# Altium PCB PCB.PcbDoc (part 1 of 3)
Units mm, origin at the board's own origin, x right, y up, seen from the top; angles counter-clockwise.
Board outline 202.56 x 137.16 mm, 4 copper layers (Top Layer, Layer 1, Layer 2, Bottom Layer), stack 0.603 mm thick; 171 components, 95 nets, 481 pads, 76 vias.
Unrouted connection lines stored in the file: 155.
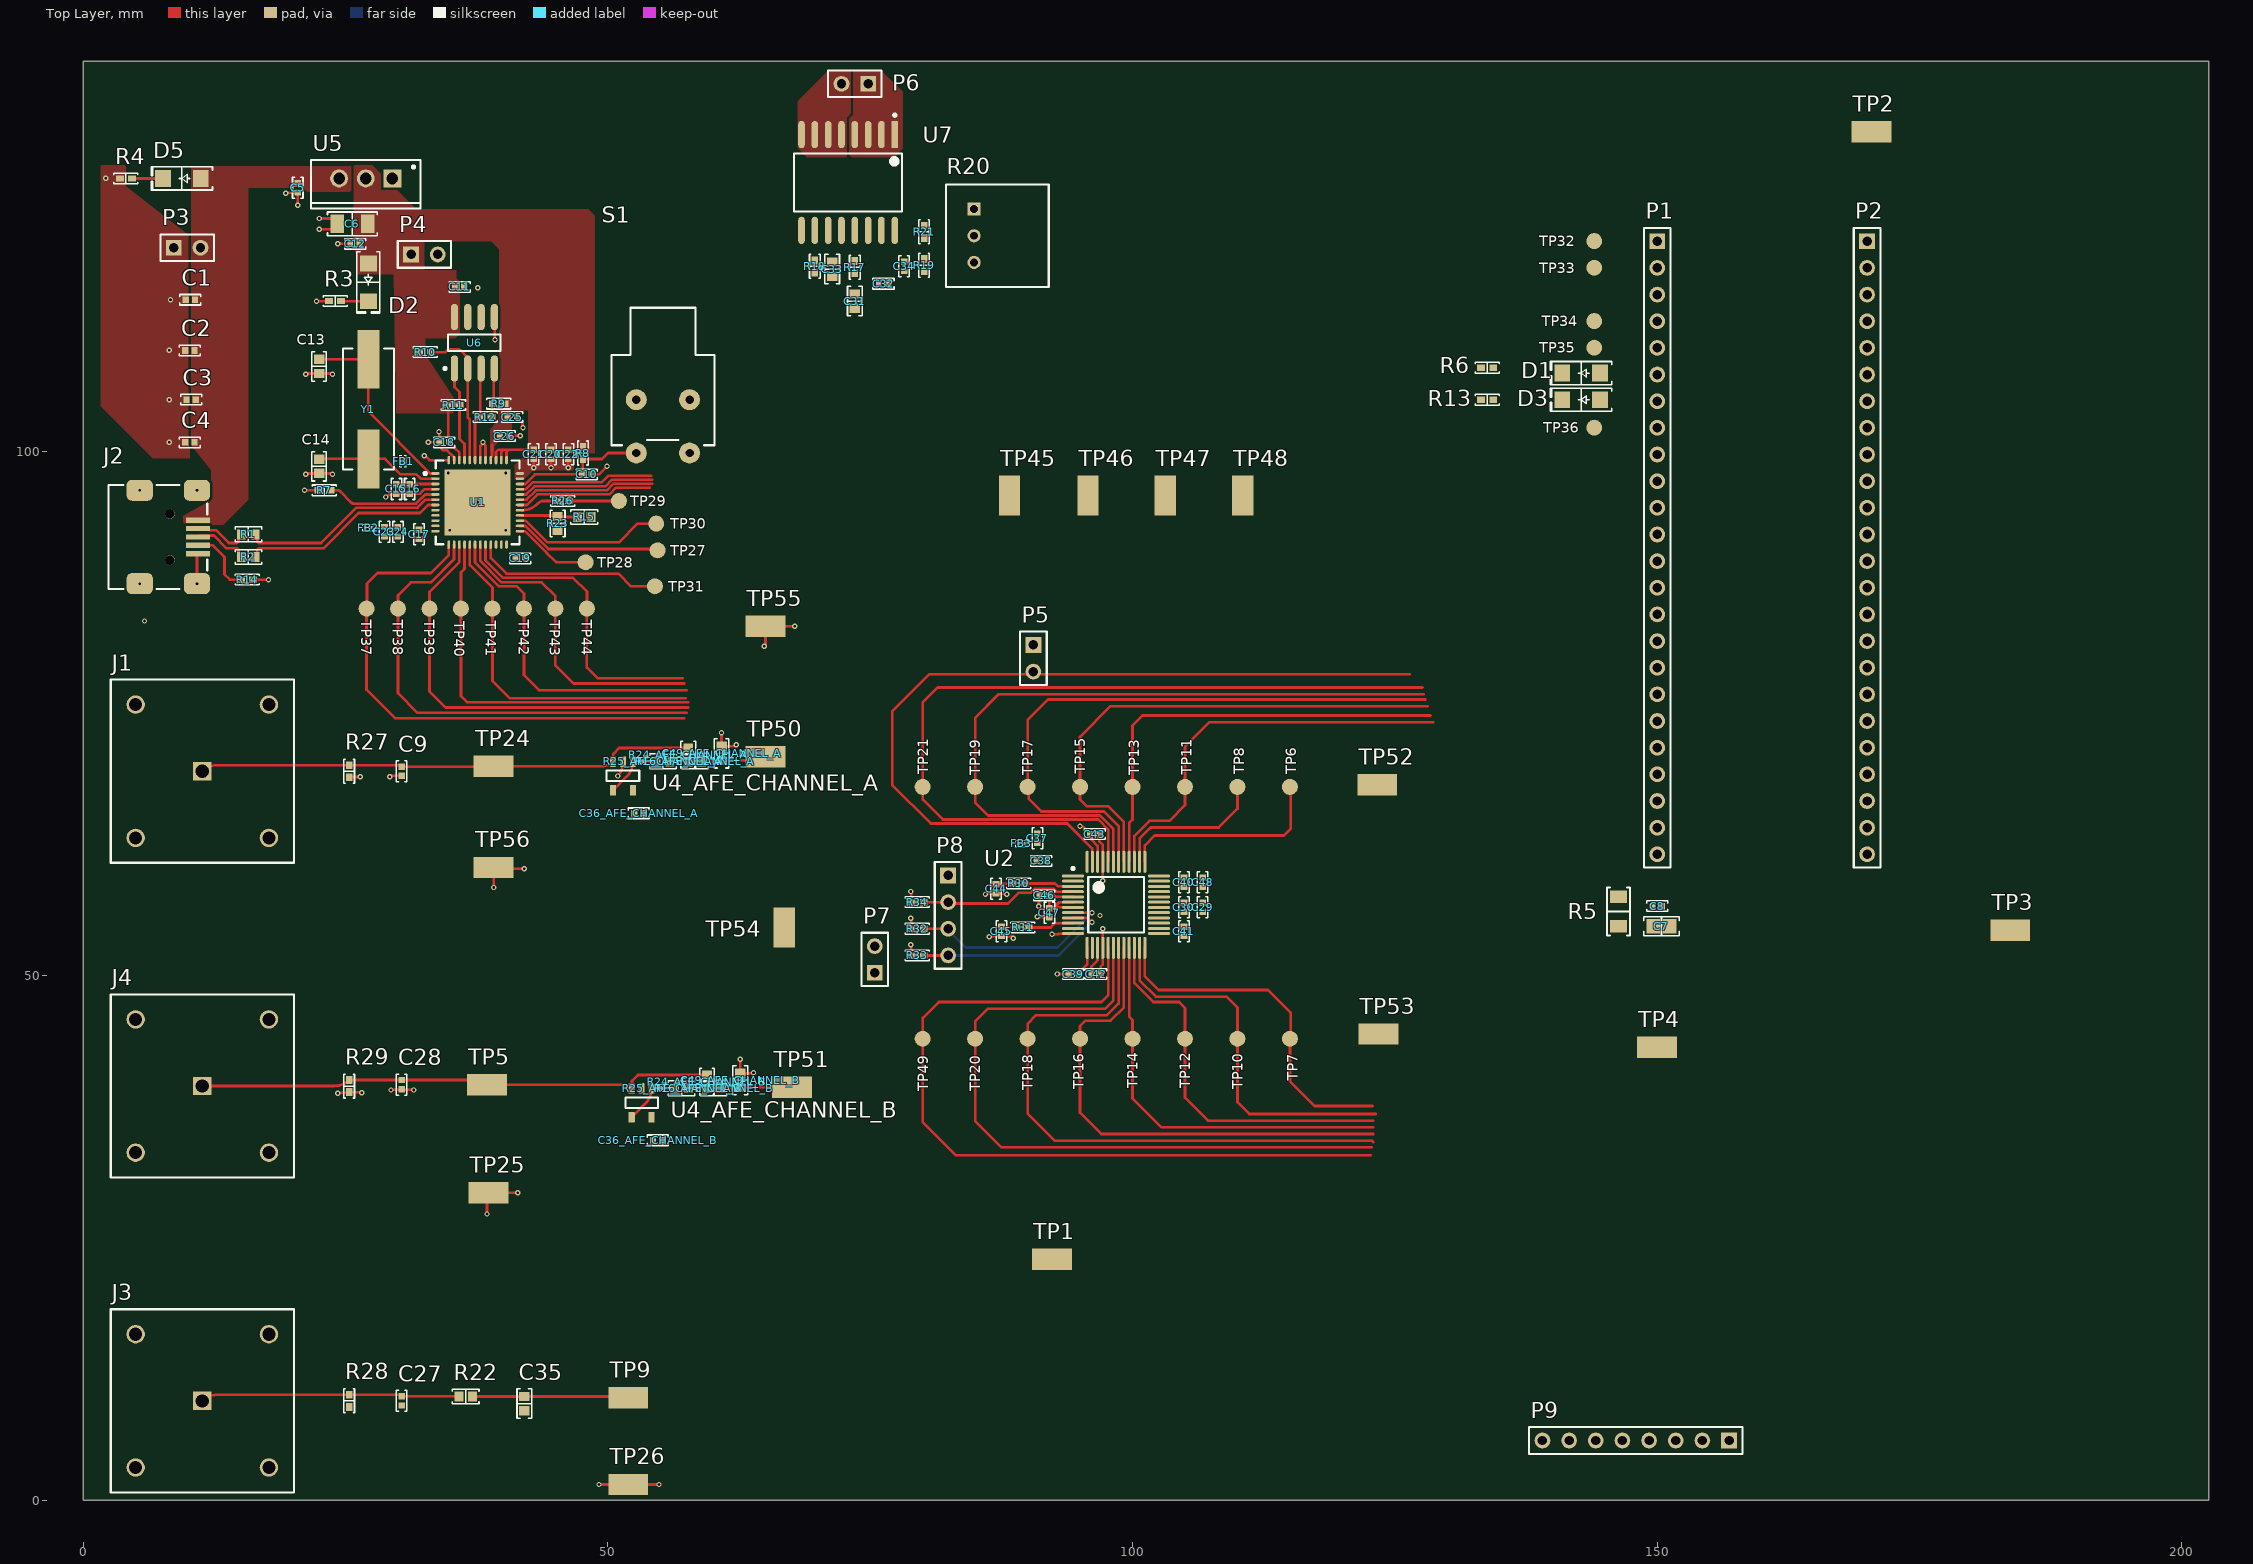
[diagram p0: Top Layer view]
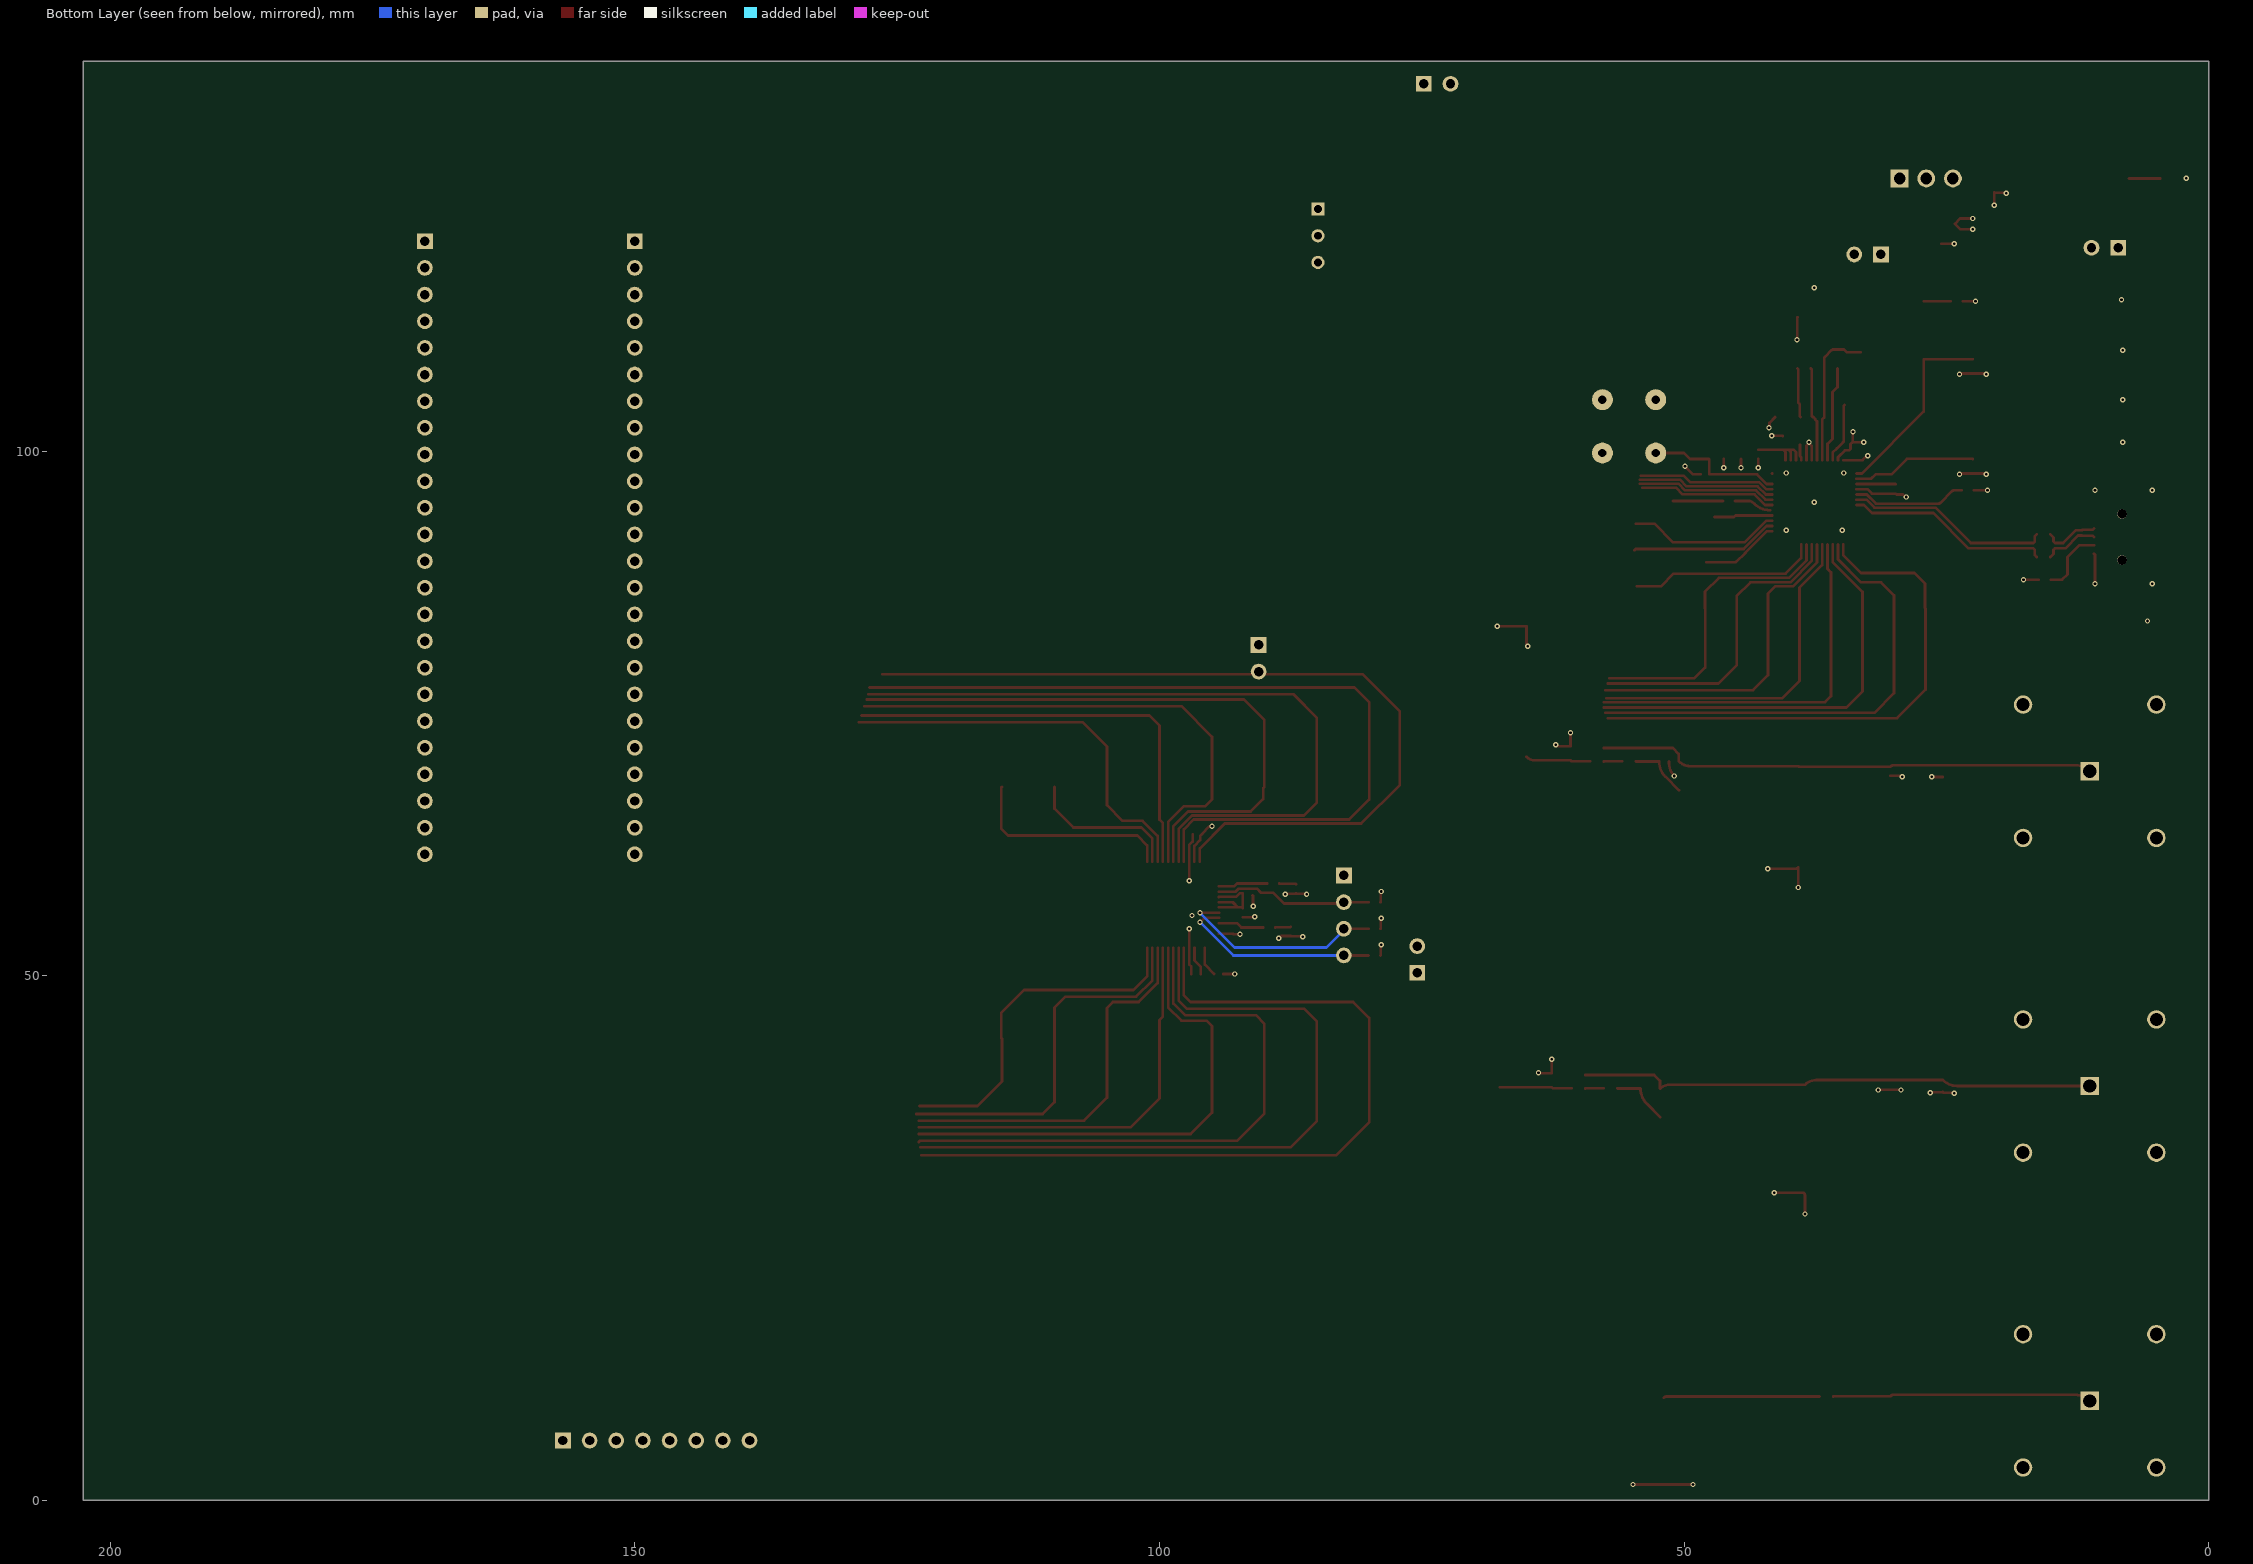
[diagram p1: Bottom Layer view, seen from below]
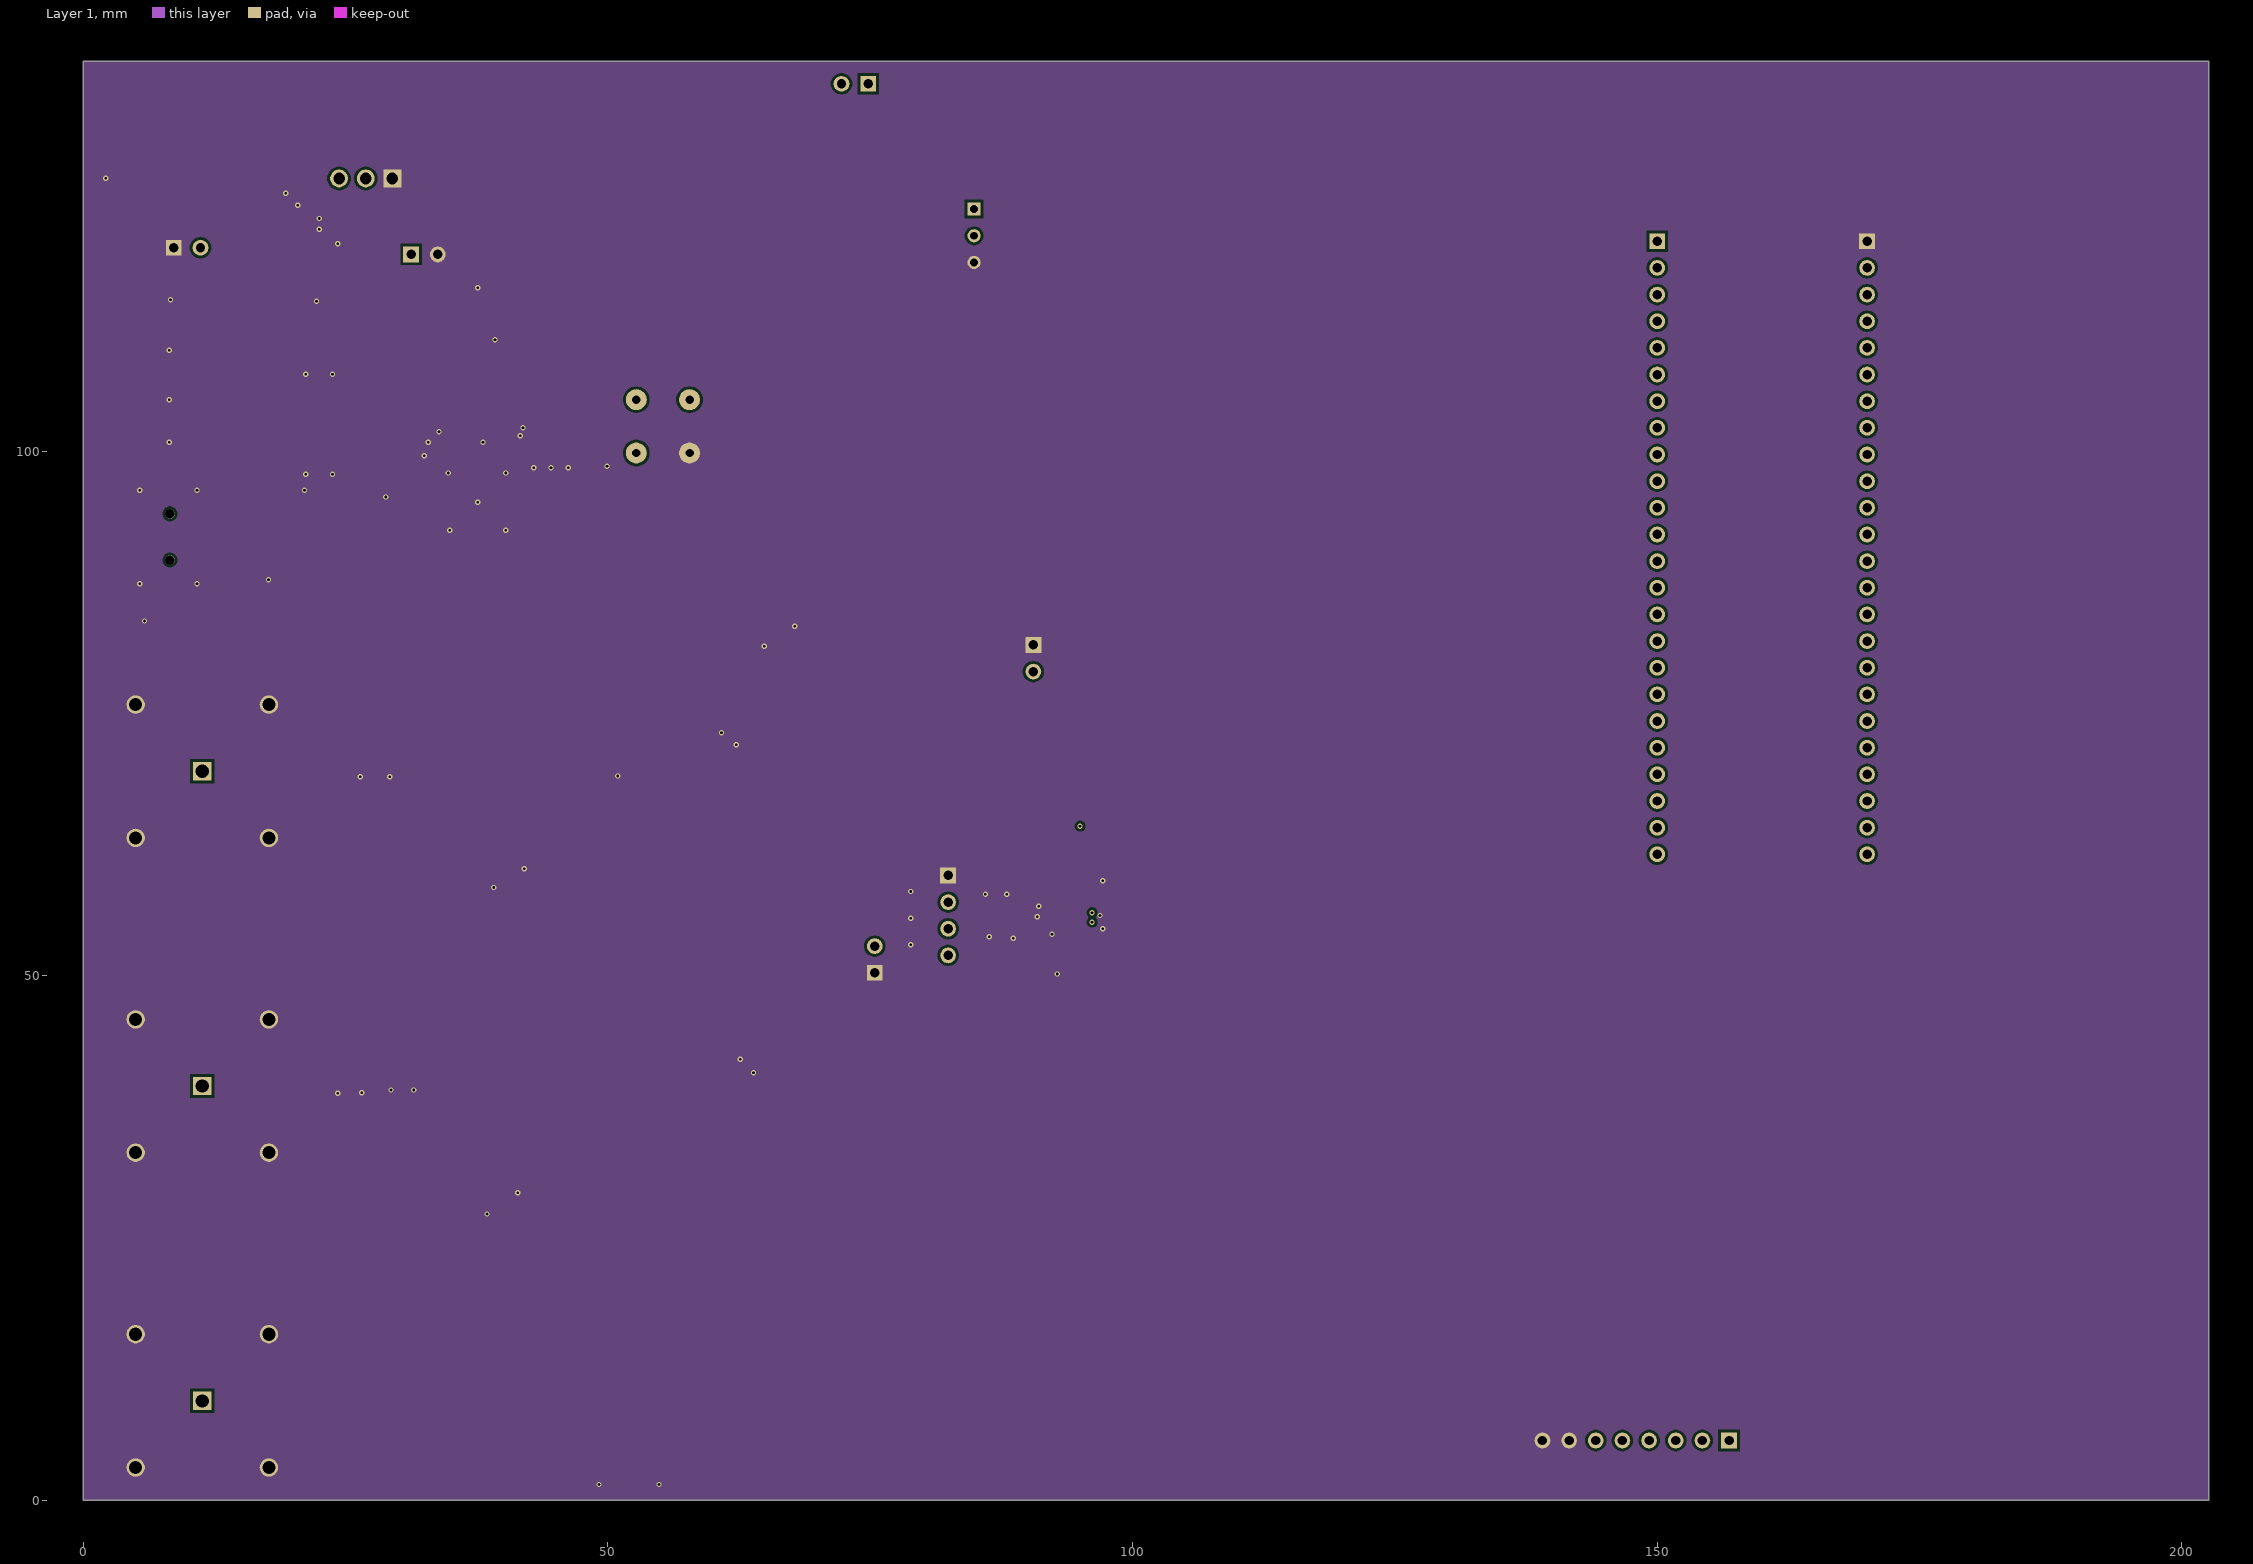
[diagram p2: Layer 1]
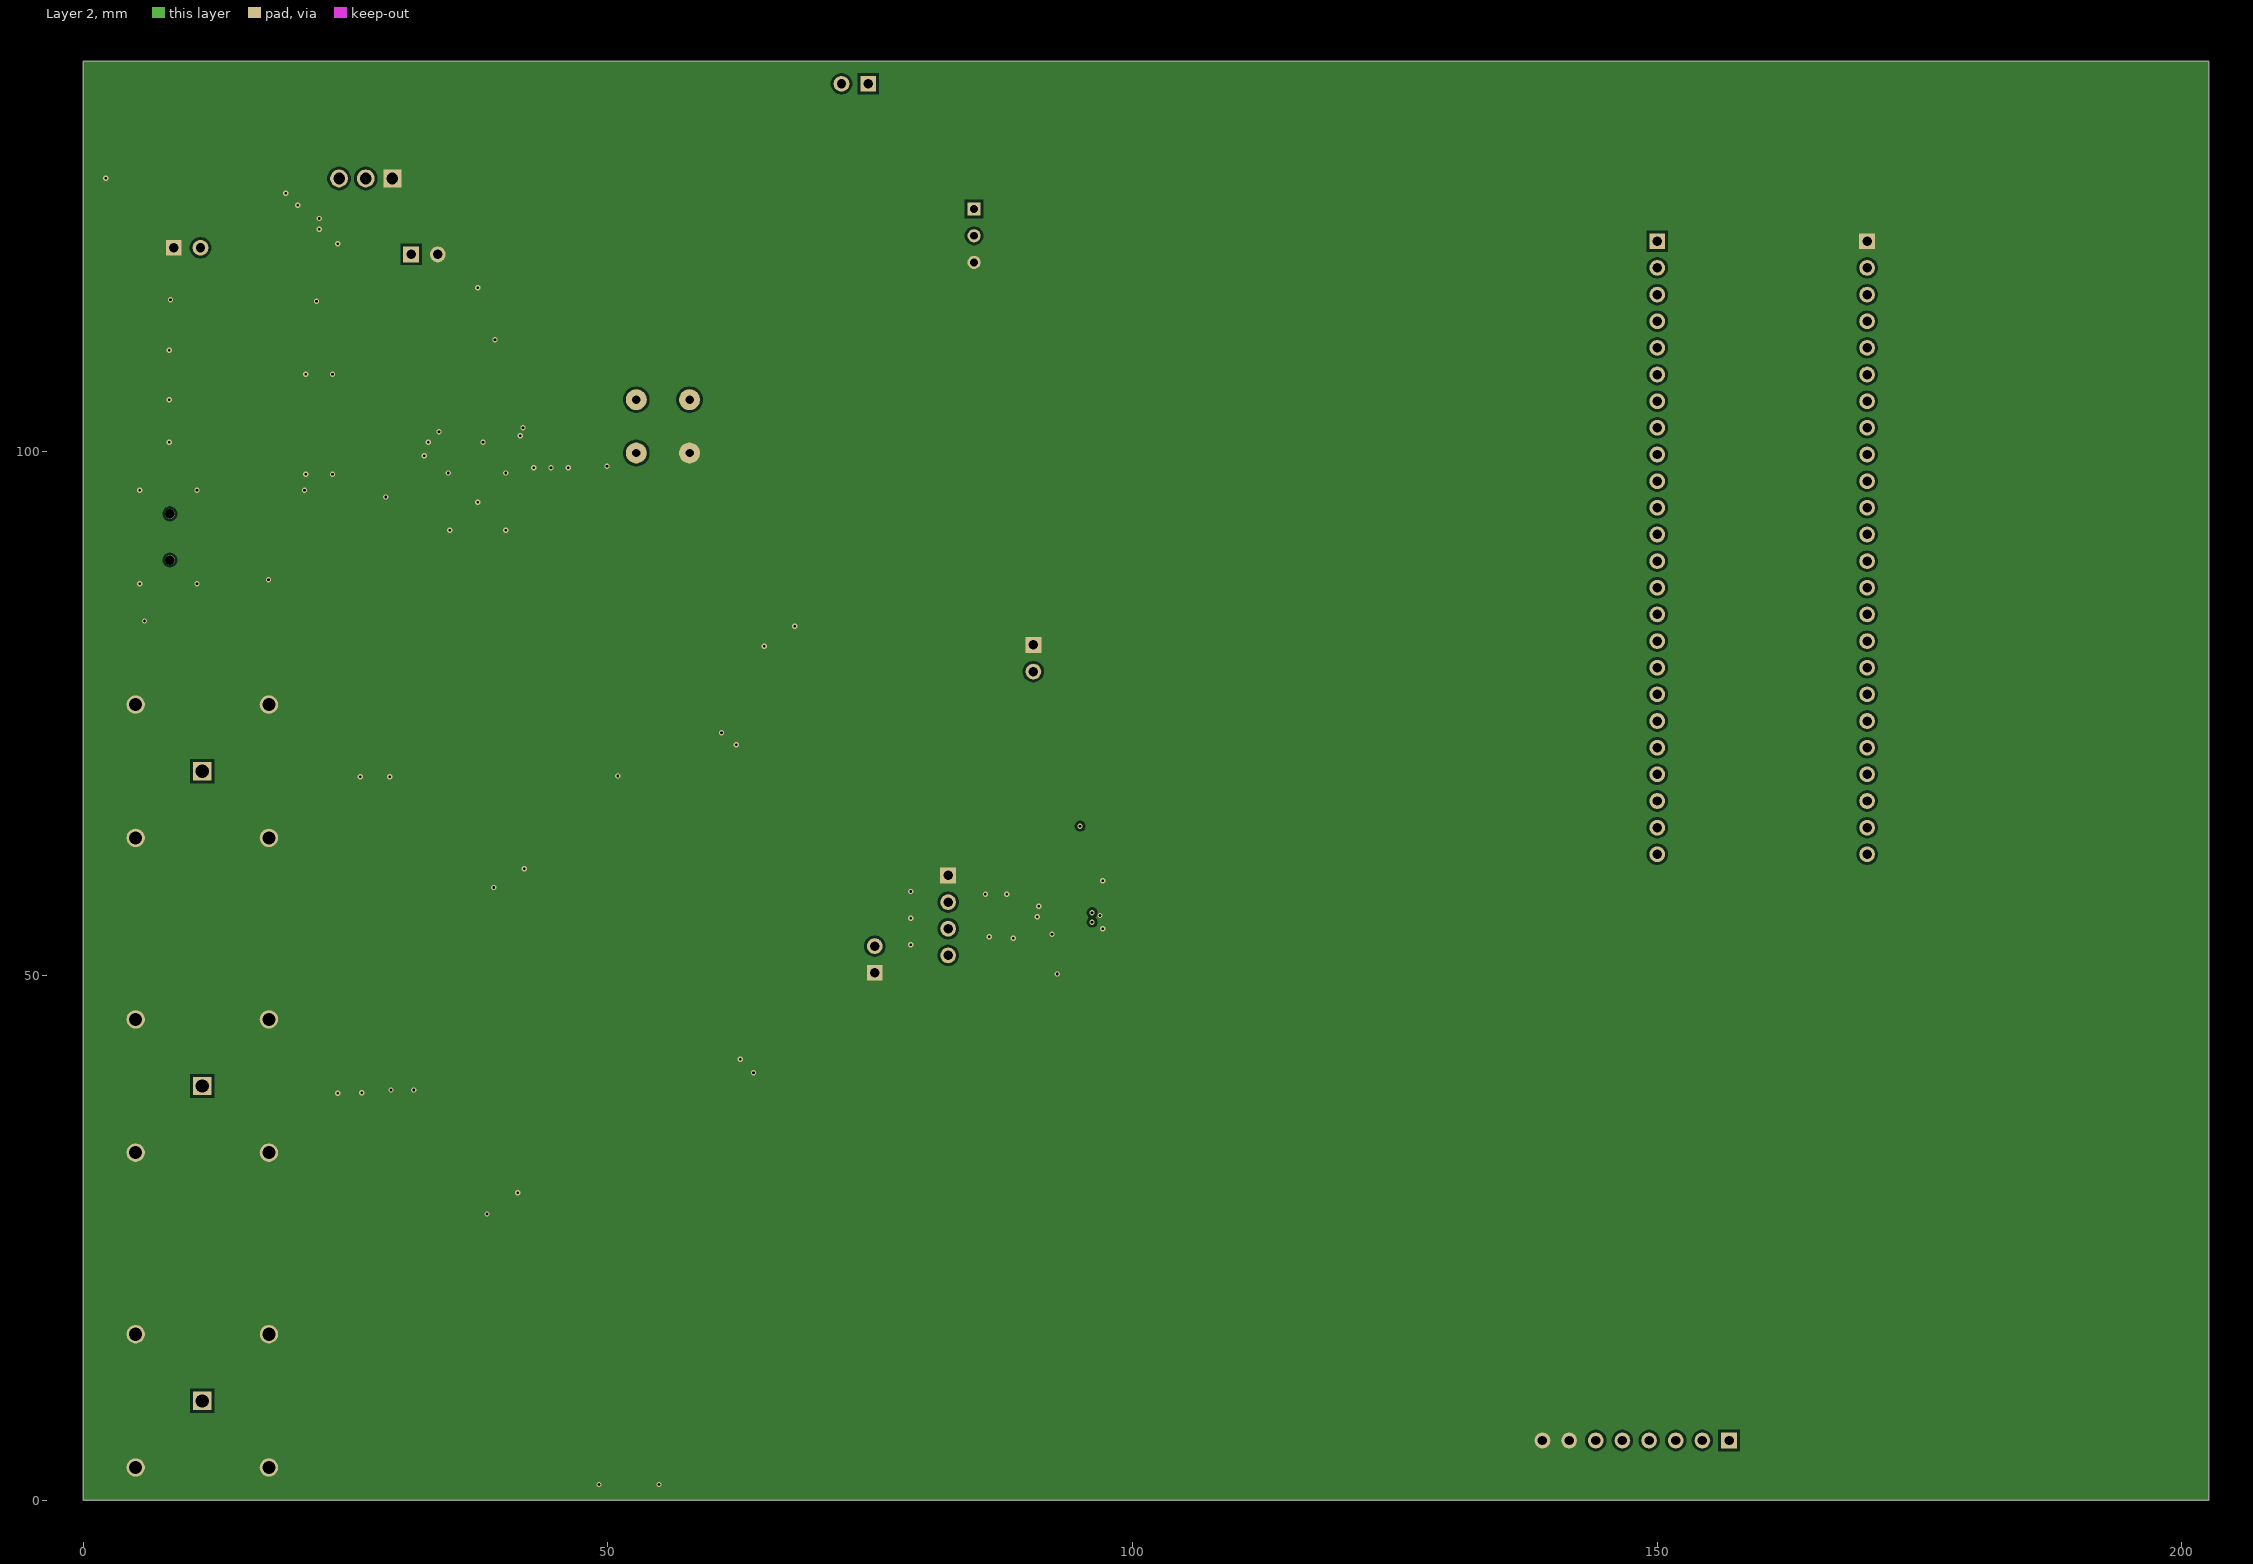
[diagram p3: Layer 2]

## Layer stack, top to bottom
Top Solder: solder mask 0.0102, Solder Resist, Dk 3.5
Top Layer: signal copper 0.0356
Dielectric 2: prepreg 0.0711, PP-006, Dk 4.1
Layer 1: signal copper 0.035
Dielectric 1: dielectric 0.32, FR-4, Dk 4.8
Layer 2: signal copper 0.035
Dielectric 3: prepreg 0.0711, PP-006, Dk 4.1
Bottom Layer: signal copper 0.0356
Bottom Solder: solder mask 0.0102, Solder Resist, Dk 3.5

## Board outline
0,0 202.565,0 202.565,137.16 0,137.16

## Design rules (kind name [scope] priority, off if disabled: settings)
Clearance [All] p1: gap=0.254 ignorepadtopadclearanceinfootprint=TRUE except(0: Arc-Hole Track-Hole SMDPad-Hole THPad-Hole Via-Hole Fill-Hole Poly-Hole Region-Hole Text-Hole; 0.127: Arc-Arc Arc-Track Track-Track; 0.2: Arc-SMDPad Track-SMDPad)
DiffPairsRouting [All] p1: maxlimit=0.254 minlimit=0.254 mostfreqgap=0.254 toplayer_minwidth=0.254 toplayer_maxwidth=0.381 toplayer_prefwidth=0.381 midlayer1_minwidth=0.254 midlayer1_maxwidth=0.381 midlayer1_prefwidth=0.381 midlayer2_minwidth=0.254 midlayer2_maxwidth=0.381 midlayer2_prefwidth=0.381 bottomlayer_minwidth=0.254 bottomlayer_maxwidth=0.381 bottomlayer_prefwidth=0.381 maxuncoupledlength=12.7
PolygonConnect PolygonConnect_POWER [InNet('IP+') or InNet('IP-') or InNet('GND') or InNet('VCC3V3') or InNet('VBUS_USB')] p1: connectstyle=Direct reliefconductorwidth=0.254 reliefentries=4 polygonreliefangle="90 Angle" airgapwidth=0.254
PolygonConnect PolygonConnect_General [All] p2: connectstyle=Relief reliefconductorwidth=0.254 reliefentries=4 polygonreliefangle="90 Angle" airgapwidth=0.127
RoutingVias [All] p1: holewidth=0.711 width=1.27 viastyle="Through Hole" minholewidth=0.254 minwidth=0.508 maxholewidth=0.711 maxwidth=1.27
SolderMaskExpansion [All] p1: expansion=0.102 istentingtop=FALSE
Width [All] p1: maxlimit=0.254 minlimit=0.254 preferedwidth=0.254
29 further rules are at their usual default settings.

## Classes and differential pairs
channel class AFE: AFE_CHANNEL_A AFE_CHANNEL_B
net class USB: USB_D_N USB_D_P USB_MICRO_D_N USB_MICRO_D_P
net class FTDI_AD[0..7]: FTDI_AD0 FTDI_AD1 FTDI_AD2 FTDI_AD3 FTDI_AD4 FTDI_AD5 FTDI_AD6 FTDI_AD7
net class DIFF90: USB_D_N USB_D_P USB_MICRO_D_N USB_MICRO_D_P
net class ADC_B_D[0..7]: ADC_B_D0 ADC_B_D1 ADC_B_D2 ADC_B_D3 ADC_B_D4 ADC_B_D5 ADC_B_D6 ADC_B_D7
net class ADC_A_D[0..7]: ADC_A_D0 ADC_A_D1 ADC_A_D2 ADC_A_D3 ADC_A_D4 ADC_A_D5 ADC_A_D6 ADC_A_D7
component class USB_FIFO: C10 C11 C13 C14 C15 C16 C17 C18 C19 C20 C21 C22 C23 C24 C25 C26 FB1 FB2 R7 R8 R9 R10 R11 R12 R15 R23 R26 S1 U1 U6 Y1
component class TOP: P5 P7 P8 TP1 TP2 TP3 TP4
component class POWER: C5 C6 C12 D2 P4 R3 U5
component class FPGA_MODULE: C7 C8 D1 D3 P1 P2 P9 R5 R6 R13 TP27 TP28 TP29 TP30 TP31 TP32 TP33 TP34 TP35 TP36 TP37 TP38 TP39 TP40 TP41 TP42 TP43 TP44 TP45 TP46 TP47 TP48
component class CURRENT_MONITOR: C31 C32 C33 C34 P6 R17 R18 R19 R20 R21 U7
component class CONNECTORS: C1 C2 C3 C4 C9 C27 C28 C35 D5 J1 J2 J3 J4 P3 R1 R2 R4 R14 R22 R27 R28 R29 TP5 TP9 TP24 TP25 TP26 TP56
component class AFE_CHANNEL_B: C36_AFE_CHANNEL_B C49_AFE_CHANNEL_B R16_AFE_CHANNEL_B R24_AFE_CHANNEL_B R25_AFE_CHANNEL_B U4_AFE_CHANNEL_B
component class AFE_CHANNEL_A: C36_AFE_CHANNEL_A C49_AFE_CHANNEL_A R16_AFE_CHANNEL_A R24_AFE_CHANNEL_A R25_AFE_CHANNEL_A U4_AFE_CHANNEL_A
component class ADC: C29 C30 C37 C38 C39 C40 C41 C42 C43 C44 C45 C46 C47 C48 FB3 R30 R31 R32 R33 R34 TP6 TP7 TP8 TP10 TP11 TP12 TP13 TP14 TP15 TP16 TP17 TP18 TP19 TP20 TP21 TP49 TP50 TP51 TP52 TP53 TP54 TP55 U2
differential pair USB_MICRO_D: +USB_MICRO_D_P -USB_MICRO_D_N
differential pair USB_D: +USB_D_P -USB_D_N

## Components (designator, comment, footprint, x,y, rotation, side; value= is the part's Value field where it differs from the comment)
C1 "10 µF" "CAP 0402_1005" 10.219,114.427 r0 top
C2 "10 µF" "CAP 0402_1005" 10.16,109.601 r0 top
C3 "1 µF" "CAP 0402_1005" 10.287,104.902 r0 top
C4 "0.1 µF" "CAP 0402_1005" 10.16,100.838 r0 top
C5 "0.1µF" "CAP 0402_1005" 20.447,125.095 r90 top
C6 "10 µF" "CAP 1206_3216 - 0.8MM" 25.654,121.666 r0 top
C7 "10 µF" "CAP 0805_2012" 150.406,54.737 r180 top
C8 "4.7 µF" "CAP 0402_1005" 149.987,56.642 r180 top
C9 "20pF" "CAP 0402_1005" 30.347,69.495 r90 top
C10 "10000 pF" "CAP 0402_1005" 48.006,97.79 r180 top
C11 "0.1 µF" "CAP 0402_1005" 35.885,115.659 r180 top
C12 "0.1µF" "CAP 0402_1005" 25.908,119.761 r0 top
C13 "36pF" "CAP 0603_1608" 22.479,108.077 r90 top
C14 "36pF" "CAP 0603_1608" 22.479,98.552 r90 top
C15 "4.7 µF" "CAP 0402_1005" 29.845,96.393 r90 top
C16 "0.1 µF" "CAP 0402_1005" 31.115,96.393 r90 top
C17 "0.1 µF" "CAP 0402_1005" 32.004,92.075 r270 top
C18 "0.1 µF" "CAP 0402_1005" 34.417,100.838 r0 top
C19 "0.1 µF" "CAP 0402_1005" 41.656,89.789 r0 top
C20 "0.1 µF" "CAP 0402_1005" 44.577,99.695 r90 top
C21 "0.1 µF" "CAP 0402_1005" 42.926,99.695 r90 top
C22 "0.1 µF" "CAP 0402_1005" 46.228,99.695 r90 top
C23 "4.7 µF" "CAP 0402_1005" 28.708,92.322 r90 top
C24 "0.1 µF" "CAP 0402_1005" 29.982,92.298 r90 top
C25 "4.7 µF" "CAP 0402_1005" 40.894,103.251 r180 top
C26 "0.1 µF" "CAP 0402_1005" 40.162,101.434 r180 top
C27 "20pF" "CAP 0402_1005" 30.347,9.495 r90 top
C28 "20pF" "CAP 0402_1005" 30.347,39.624 r90 top
C29 "0.1 µF" "CAP 0402_1005" 106.68,56.521 r90 top
C30 "0.1 µF" "CAP 0402_1005" 104.902,56.521 r90 top
C31 "1 µF" "CAP 0603_1608" 73.533,114.3 r90 top
C32 "0.1µF" "CAP 0402_1005" 76.268,115.951 r180 top
C33 "4700 pF" "CAP 0603_1608" 71.374,117.348 r90 top
C34 "0.1µF" "CAP 0402_1005" 78.232,117.602 r90 top
C35 "4700 pF" "CAP 0603_1608" 42.037,9.231 r90 top
C36_AFE_CHANNEL_A "0.1 µF" "CAP 0402_1005" 52.959,65.492 r180 top (schematic designator C36)
C36_AFE_CHANNEL_B "0.1 µF" "CAP 0402_1005" 54.737,34.33 r180 top (schematic designator C36)
C37 "10 µF" "CAP 0402_1005" 90.932,63.119 r270 top
C38 "0.1 µF" "CAP 0402_1005" 91.313,60.96 r0 top
C39 "0.1 µF" "CAP 0402_1005" 94.361,50.165 r0 top
C40 "0.1 µF" "CAP 0402_1005" 104.902,58.928 r270 top
C41 "0.1 µF" "CAP 0402_1005" 104.902,54.229 r90 top
C42 "0.1 µF" "CAP 0402_1005" 96.52,50.165 r180 top
C43 "0.1 µF" "CAP 0402_1005" 96.393,63.5 r180 top
C44 "0.1 µF" "CAP 0402_1005" 86.995,58.293 r90 top
C45 "0.1 µF" "CAP 0402_1005" 87.503,54.229 r90 top
C46 "0.1 µF" "CAP 0402_1005" 91.567,57.658 r0 top
C47 "0.1 µF" "CAP 0402_1005" 92.075,56.007 r90 top
C48 "10 µF" "CAP 0402_1005" 106.68,58.928 r270 top
C49_AFE_CHANNEL_A "160 pF" "CAP 0603_1608" 60.833,71.207 r270 top (schematic designator C49)
C49_AFE_CHANNEL_B "160 pF" "CAP 0603_1608" 62.611,40.045 r270 top (schematic designator C49)
D1 "Blue" "LED 1206_3216 BLUE" 142.748,107.442 r180 top
D2 "Green" "LED 1206_3216 GREEN" 27.178,116.078 r270 top
D3 "Blue" "LED 1206_3216 BLUE" 142.748,104.902 r180 top
D5 "Green" "LED 1206_3216 GREEN" 9.398,125.984 r180 top
FB1 "33 Ohms @ 100 MHz" "FER 0201_0603" 30.48,99.06 r90 top
FB2 "33 Ohms @ 100 MHz" "FER 0201_0603" 27.178,92.71 r180 top
FB3 "33 Ohms @ 100 MHz" "FER 0201_0603" 89.408,62.611 r0 top
J1 "5227699-2" TECO-5227699-2_V 11.347,69.495 r0 top
J2 "10033526-N3212LF" "FCI USB 10033526-N3212LF" 7.112,91.821 r90 top
J3 "5227699-2" TECO-5227699-2_V 11.347,9.495 r0 top
J4 "5227699-2" TECO-5227699-2_V 11.347,39.495 r0 top
P1 "Header 24" HDR1X24 150,120 r270 top locked
P2 "Header 24" HDR1X24 170,120 r270 top locked
P3 "Header 2" HDR1X2 8.636,119.38 r0 top
P4 "Header 2" HDR1X2 31.242,118.745 r0 top
P5 "Header 2" HDR1X2 90.551,81.534 r270 top
P6 "Header 2" HDR1X2 74.803,135.001 r180 top
P7 "Header 2" HDR1X2 75.438,50.292 r90 top
P8 "Header 4" HDR1X4 82.423,59.563 r270 top
P9 "Header 8" HDR1X8 156.845,5.715 r180 top
R1 "10 Ohms" "RES 0603_1608" 15.748,92.075 r0 top
R2 "10 Ohms" "RES 0603_1608" 15.748,89.916 r0 top
R3 "220 Ohms" "RES 0402_1005" 24.003,114.3 r0 top
R4 "330 Ohms" "RES 0402_1005" 4.064,125.984 r0 top
R5 "0 Ohms" "RES 1206_3216" 146.304,56.134 r270 top
R6 "220 Ohms" "RES 0402_1005" 133.798,107.95 r0 top
R7 "12 kOhms" "RES 0402_1005" 22.987,96.266 r0 top
R8 "10 kOhms" "RES 0402_1005" 47.625,99.822 r90 top
R9 "10 kOhms" "RES 0402_1005" 39.603,104.521 r0 top
R10 "10 kOhms" "RES 0402_1005" 32.583,109.436 r180 top
R11 "10 kOhms" "RES 0402_1005" 35.285,104.394 r180 top
R12 "1.8 kOhms" "RES 0402_1005" 38.333,103.251 r180 top
R13 "220 Ohms" "RES 0402_1005" 133.798,104.902 r0 top
R14 "100 kOhms" "RES 0402_1005" 15.621,87.757 r180 top
R15 "0 Ohms" "RES 0603_1608" 47.752,93.726 r0 top
R16_AFE_CHANNEL_A "50 Ohms" "RES 0603_1608" 58.293,70.445 r0 top (schematic designator R16)
R16_AFE_CHANNEL_B "50 Ohms" "RES 0603_1608" 60.071,39.283 r0 top (schematic designator R16)
R17 "10 kOhms" "RES 0402_1005" 73.533,117.542 r270 top
R18 "10 kOhms" "RES 0402_1005" 69.723,117.602 r270 top
R19 "10 kOhms" "RES 0402_1005" 80.137,117.729 r270 top
R20 "3310R-125-103L" FP-3310R-MFG 87.122,120.523 r270 top
R21 "10 kOhms" "RES 0402_1005" 80.137,120.904 r270 top
R22 "75 Ohms" "RES 0603_1608" 36.449,9.906 r0 top
R23 "0 Ohms" "RES 0603_1608" 45.212,93.106 r270 top
R24_AFE_CHANNEL_A "0 Ohms" "RES 0603_1608" 57.658,71.065 r270 top (schematic designator R24)
R24_AFE_CHANNEL_B "0 Ohms" "RES 0603_1608" 59.436,39.903 r270 top (schematic designator R24)
R25_AFE_CHANNEL_A "0 Ohms" "RES 0603_1608" 55.245,70.445 r0 top (schematic designator R25)
R25_AFE_CHANNEL_B "0 Ohms" "RES 0603_1608" 57.023,39.283 r0 top (schematic designator R25)
R26 "24 Ohms" "RES 0402_1005" 45.72,95.25 r0 top
R27 "1 MOhms" "RES 0402_1005" 25.347,69.495 r90 top
R28 "1 MOhms" "RES 0402_1005" 25.347,9.495 r90 top
R29 "1 MOhms" "RES 0402_1005" 25.347,39.495 r90 top
R30 "25 Ohms" "RES 0402_1005" 89.154,58.801 r0 top
R31 "25 Ohms" "RES 0402_1005" 89.535,54.61 r0 top
R32 "10 kOhms" "RES 0402_1005" 79.502,54.483 r0 top
R33 "10 kOhms" "RES 0402_1005" 79.502,51.943 r0 top
R34 "10 kOhms" "RES 0402_1005" 79.502,57.023 r0 top
S1 "AB11AH-HA" "NKK AB11AH-HA" 55.245,104.902 r0 top
TP1 "5019" KSTN-5019_V 92.329,22.987 r0 top
TP2 "5019" KSTN-5019_V 170.434,130.429 r0 top
TP3 "5019" KSTN-5019_V 183.642,54.356 r0 top
TP4 "5019" KSTN-5019_V 149.987,43.18 r0 top
TP5 "5019" KSTN-5019_V 38.481,39.624 r0 top
TP6 "Test Point" TP1 115,68 r90 top
TP7 "Test Point" TP1 115,44 r90 top
TP8 "Test Point" TP1 110,68 r90 top
TP9 "5019" KSTN-5019_V 51.943,9.779 r0 top
TP10 "Test Point" TP1 110,44 r90 top
TP11 "Test Point" TP1 105,68 r90 top
TP12 "Test Point" TP1 105,44 r90 top
TP13 "Test Point" TP1 100,68 r90 top
TP14 "Test Point" TP1 100,44 r90 top
TP15 "Test Point" TP1 95,68 r90 top
TP16 "Test Point" TP1 95,44 r90 top
TP17 "Test Point" TP1 90,68 r90 top
TP18 "Test Point" TP1 90,44 r90 top
TP19 "Test Point" TP1 85,68 r90 top
TP20 "Test Point" TP1 85,44 r90 top
TP21 "Test Point" TP1 80,68 r90 top
TP24 "5019" KSTN-5019_V 39.116,69.977 r0 top
TP25 "5019" KSTN-5019_V 38.608,29.337 r180 top
TP26 "5019" KSTN-5019_V 51.943,1.524 r180 top
TP27 "Test Point" TP1 54.737,90.551 r0 top
TP28 "Test Point" TP1 47.879,89.408 r0 top
TP29 "Test Point" TP1 51.054,95.25 r90 top
TP30 "Test Point" TP1 54.61,93.091 r90 top
TP31 "Test Point" TP1 54.483,87.122 r90 top
TP32 "Test Point" TP1 144,120.015 r270 top
TP33 "Test Point" TP1 144,117.475 r270 top
TP34 "Test Point" TP1 144,112.395 r90 top
TP35 "Test Point" TP1 144,109.855 r90 top
TP36 "Test Point" TP1 144,102.235 r90 top
TP37 "Test Point" TP1 27,85 r270 top
TP38 "Test Point" TP1 30,85 r270 top
TP39 "Test Point" TP1 33,85 r270 top
TP40 "Test Point" TP1 36,85 r90 top
TP41 "Test Point" TP1 39,85 r90 top
TP42 "Test Point" TP1 42,85 r270 top
TP43 "Test Point" TP1 45,85 r90 top
TP44 "Test Point" TP1 48,85 r270 top
TP45 "5019" KSTN-5019_V 88.265,95.758 r90 top
TP46 "5019" KSTN-5019_V 95.758,95.758 r90 top
TP47 "5019" KSTN-5019_V 103.124,95.758 r90 top
TP48 "5019" KSTN-5019_V 110.49,95.758 r90 top
TP49 "Test Point" TP1 80,44 r90 top
TP50 "5019" KSTN-5019_V 65.024,70.866 r0 top
TP51 "5019" KSTN-5019_V 67.564,39.37 r180 top
TP52 "5019" KSTN-5019_V 123.317,68.199 r180 top
TP53 "5019" KSTN-5019_V 123.444,44.45 r180 top
TP54 "5019" KSTN-5019_V 66.802,54.61 r90 top
TP55 "5019" KSTN-5019_V 65.024,83.312 r180 top
TP56 "5019" KSTN-5019_V 39.116,60.325 r180 top
U1 "FT232HQ-REEL" FP-QFN-48-MFG 37.592,95.123 r0 top
U2 "AD9288BSTZ-40" ST-48_M 98.425,56.769 r0 top
U4_AFE_CHANNEL_A "LMH6702MF/NOPB" DBV0005A_N 51.435,69.048 r270 top (schematic designator U4)
U4_AFE_CHANNEL_B "LMH6702MF/NOPB" DBV0005A_N 53.213,37.886 r270 top (schematic designator U4)
U5 "LD1117V33C" TO220 26.924,125.984 r180 top
U6 "93LC56BT/SN" SOIC-SN8_M 37.282,110.325 r90 top
U7 "ACS720KLATR-15AB-T" FP-LA-16-IPC_A 72.898,125.603 r270 top
Y1 "12 MHz" "ABRACON ABLS" 27.178,104.013 r90 top

## Footprints (in the part's own frame and the unit in brackets; to place one, negate y for a bottom-side part, rotate by r counter-clockwise, add the part's x,y. Pads: shape width x height; smd on the part's side, far side on the other; paste and mask are expansions set on the pad)
"ABRACON ABLS" [mm] "Crystal, 2-Leads, Body 4.70x11.40mm, Pitch 8.80mm, IPC Medium Density"
  rect 5.6x2.1 smd: 1(-4.75,0) 2(4.75,0)
  silkscreen extent -5.77,-2.43 5.77,2.43, body extent -6.35,-2.35 6.35,2.35, height 4.2
"CAP 0402_1005" [mm] "Chip Capacitor, 2-Leads, Body 1.02x0.51mm, IPC Medium Density"
  rect 0.6x0.64 smd: 1(-0.44,0) 2(0.44,0)
  silkscreen extent -1,-0.5 1,0.5, body extent -0.5,-0.26 0.5,0.26, height 0.52
"CAP 0603_1608" [mm] "Chip Capacitor, 2-Leads, Body 1.60x0.80mm, IPC Medium Density"
  rect 0.9x1 smd: 1(-0.675,0) 2(0.675,0)
  silkscreen extent -1.4,-0.7 1.4,0.7, body extent -0.8,-0.41 0.8,0.41, height 0.82
"CAP 0805_2012" [mm] "Chip Capacitor, 2-Leads, Body 2.00x1.20mm, IPC Medium Density"
  rect 1.3x1.4 smd: 1(-0.8,0) 2(0.8,0)
  silkscreen extent -1.7,-0.9 1.7,0.9, body extent -1,-0.64 1,0.64, height 1.26
"CAP 1206_3216 - 0.8MM" [mm] "Chip Capacitor, 2-Leads, Body 3.25x1.60mm, IPC Medium Density"
  rect 1.3x1.8 smd: 1(-1.45,0) 2(1.45,0)
  silkscreen extent -2.37,-1.12 2.37,1.12, body extent -1.6,-0.8 1.6,0.8, height 0.8
DBV0005A_N [mm] "SOT23, 5-Leads, Body 3.05x1.75mm, Pitch 0.95mm, IPC Medium Density"
  rrect17% 1x0.6 smd: 1(-1.375,0.95) 2(-1.375,0) 3(-1.375,-0.95) 4(1.375,-0.95) 5(1.375,0.95)
  silkscreen extent -1.5,-1.55 0.5,1.93, body extent -1.42,-1.46 1.42,1.46, height 1.08
"FCI USB 10033526-N3212LF" [mm] "USB 2.0 Type B Mini"
  rect 0.5x2.25 smd: 1(1.6,-3.826) 2(0.8,-3.826) 3(0,-3.826) 4(-0.8,-3.826) 5(-1.6,-3.826)
  round 0.9 hole 0.9 unplated: M(-2.2,-1.151) M(2.2,-1.151)
  rrect50% 2x2.5 smd: S(-4.45,-3.731) S(-4.45,1.719) S(4.45,-3.731) S(4.45,1.719)
  silkscreen extent -4.95,-4.71 4.95,4.69, body extent -4.95,-4.7 4.95,4.7, height 4.01
"FER 0201_0603" [mm] "Chip Inductor, 2-Leads, Body 0.60x0.30mm, IPC Medium Density"
  rect 0.25x0.3 smd: 1(-0.275,0) 2(0.275,0)
  silkscreen extent -0.55,-0.3 0.55,0.3, body extent -0.3,-0.15 0.3,0.15, height 0.29
FP-3310R-MFG [mm]
  rect 1.25x1.25 hole 0.75 paste-1000 mask+0: 1(-2.54,-2.225)
  round 1.25 hole 0.75 paste-1000 mask+0: 2(0,-2.225) 3(2.54,-2.225)
  silkscreen extent -4.89,-4.89 4.89,4.89, body extent -4.99,-4.99 4.99,4.99, height 0.25
FP-LA-16-IPC_A [mm]
  rect 2.603x0.622 smd paste+0 mask+0: 1(-4.565,4.445)
  rrect100% 2.603x0.622 smd paste+0 mask+0: 2(-4.565,3.175) 3(-4.565,1.905) 4(-4.565,0.635) 5(-4.565,-0.635) 6(-4.565,-1.905) 7(-4.565,-3.175) 8(-4.565,-4.445) 9(4.565,-4.445) 10(4.565,-3.175) 11(4.565,-1.905) 12(4.565,-0.635) 13(4.565,0.635) 14(4.565,1.905) 15(4.565,3.175) 16(4.565,4.445)
  silkscreen extent -6.54,-5.15 2.76,5.15, body extent -6.37,-5.65 6.37,5.65, height 0.25
FP-QFN-48-MFG [mm]
  rrect100% 0.8x0.25 smd paste+0 mask+0: 1(-4.025,2.75) 2(-4.025,2.25) 3(-4.025,1.75) 4(-4.025,1.25) 5(-4.025,0.75) 6(-4.025,0.25) 7(-4.025,-0.25) 8(-4.025,-0.75) 9(-4.025,-1.25) 10(-4.025,-1.75) 11(-4.025,-2.25) 12(-4.025,-2.75) 25(4.025,-2.75) 26(4.025,-2.25) 27(4.025,-1.75) 28(4.025,-1.25) 29(4.025,-0.75) 30(4.025,-0.25) 31(4.025,0.25) 32(4.025,0.75) 33(4.025,1.25) 34(4.025,1.75) 35(4.025,2.25) 36(4.025,2.75)
  rrect100% 0.25x0.8 smd paste+0 mask+0: 13(-2.75,-4.025) 14(-2.25,-4.025) 15(-1.75,-4.025) 16(-1.25,-4.025) 17(-0.75,-4.025) 18(-0.25,-4.025) 19(0.25,-4.025) 20(0.75,-4.025) 21(1.25,-4.025) 22(1.75,-4.025) 23(2.25,-4.025) 24(2.75,-4.025) 37(2.75,4.025) 38(2.25,4.025) 39(1.75,4.025) 40(1.25,4.025) 41(0.75,4.025) 42(0.25,4.025) 43(-0.25,4.025) 44(-0.75,4.025) 45(-1.25,4.025) 46(-1.75,4.025) 47(-2.25,4.025) 48(-2.75,4.025)
  rect 6.29x6.29 smd paste+0 mask+0: 49(0,0)
  silkscreen extent -5.12,-4 4,4, body extent -4.52,-4.52 4.52,4.52, height 0.25
HDR1X2 [mm] "Connector; Header; 2 Position"
  rect 1.5x1.5 hole 0.9: 1(0,0)
  round 1.5 hole 0.9: 2(2.54,0)
  silkscreen extent -1.27,-1.27 3.81,1.27
HDR1X4 [mm] "Connector; Header; 4 Position"
  rect 1.5x1.5 hole 0.9: 1(0,0)
  round 1.5 hole 0.9: 2(2.54,0) 3(5.08,0) 4(7.62,0)
  silkscreen extent -1.27,-1.27 8.89,1.27
HDR1X8 [mm] "Connector; Header; 8 Position"
  rect 1.5x1.5 hole 0.9: 1(0,0)
  round 1.5 hole 0.9: 2(2.54,0) 3(5.08,0) 4(7.62,0) 5(10.16,0) 6(12.7,0) 7(15.24,0) 8(17.78,0)
  silkscreen extent -1.27,-1.27 19.05,1.27
HDR1X24 [mm] "Connector; Header; 24 Position"
  rect 1.5x1.5 hole 0.9: 1(0,0)
  round 1.5 hole 0.9: 2(2.54,0) 3(5.08,0) 4(7.62,0) 5(10.16,0) 6(12.7,0) 7(15.24,0) 8(17.78,0) 9(20.32,0) 10(22.86,0) 11(25.4,0) 12(27.94,0) 13(30.48,0) 14(33.02,0) 15(35.56,0) 16(38.1,0) 17(40.64,0) 18(43.18,0) 19(45.72,0) 20(48.26,0) 21(50.8,0) 22(53.34,0) 23(55.88,0) 24(58.42,0)
  silkscreen extent -1.27,-1.27 59.69,1.27
KSTN-5019_V [mm] "Test Point, 1-Leads, Body 3.81x2.03mm"
  rect 3.8x2.03 smd: 1(0,0)
  body extent -1.9,-1.01 1.9,1.02, height 2.29
"LED 1206_3216 BLUE" [mm] "Chip Diode, 2-Leads, Body 3.13x1.55mm, IPC Medium Density"
  rect 1.5x1.6 smd: 1(-1.8,0) 2(1.8,0)
  silkscreen extent -2.92,-1.1 2.92,1.1, body extent -1.6,-0.8 1.6,0.8, height 0.9
"LED 1206_3216 GREEN" [mm] "Chip Diode, 2-Leads, Body 3.13x1.55mm, IPC Medium Density"
  rect 1.5x1.6 smd: 1(-1.8,0) 2(1.8,0)
  silkscreen extent -2.92,-1.1 2.92,1.1, body extent -1.6,-0.8 1.6,0.8, height 0.9
"NKK AB11AH-HA" [mm]
  round 2 hole 0.8: 1(2.54,-5.08) 2(2.54,0) 3(-2.54,-5.08) 4(-2.54,0)
  silkscreen extent -4.9,-4.34 4.9,8.76, body extent -4.9,-5.39 4.9,15.08, height 7.06
"RES 0402_1005" [mm] "Chip Resistor, 2-Leads, Body 1.0x0.5mm, IPC Medium Density"
  rect 0.75x0.6 smd: 1(-0.575,0) 2(0.575,0)
  silkscreen extent -1.14,-0.51 1.14,0.51, body extent -0.5,-0.25 0.5,0.25, height 0.35
"RES 0603_1608" [mm] "Chip Resistor, 2-Leads, Body 1.60x0.80mm, IPC Medium Density"
  rect 0.85x0.95 smd: 1(-0.65,0) 2(0.65,0)
  silkscreen extent -1.27,-0.7 1.27,0.7, body extent -0.8,-0.4 0.8,0.4, height 0.45
"RES 1206_3216" [mm] "Chip Resistor, 2-Leads, Body 3.13x1.55mm, IPC Medium Density"
  rect 1.2x1.65 smd: 1(-1.4,0) 2(1.4,0)
  silkscreen extent -2.3,-1.1 2.3,1.1, body extent -1.6,-0.8 1.6,0.8, height 0.6
SOIC-SN8_M [mm] "SOIC, 8-Leads, Body 4.9x3.9mm, Pitch 1.27mm, IPC Low Density"
  oval 2.5x0.7 smd: 1(-2.45,1.905) 2(-2.45,0.635) 3(-2.45,-0.635) 4(-2.45,-1.905) 5(2.45,-1.905) 6(2.45,-0.635) 7(2.45,0.635) 8(2.45,1.905)
  silkscreen extent -2.57,-2.5 0.8,2.93, body extent -2,-2.5 2,2.5, height 1.75
ST-48_M [mm] "Thin QFP, 48-Leads, Body 7x7mm, Pitch 0.5mm, IPC Low Density"
  oval 2.1x0.3 smd: 1(-4.1,2.75) 2(-4.1,2.25) 3(-4.1,1.75) 4(-4.1,1.25) 5(-4.1,0.75) 6(-4.1,0.25) 7(-4.1,-0.25) 8(-4.1,-0.75) 9(-4.1,-1.25) 10(-4.1,-1.75) 11(-4.1,-2.25) 12(-4.1,-2.75) 25(4.1,-2.75) 26(4.1,-2.25) 27(4.1,-1.75) 28(4.1,-1.25) 29(4.1,-0.75) 30(4.1,-0.25) 31(4.1,0.25) 32(4.1,0.75) 33(4.1,1.25) 34(4.1,1.75) 35(4.1,2.25) 36(4.1,2.75)
  oval 0.3x2.1 smd: 13(-2.75,-4.1) 14(-2.25,-4.1) 15(-1.75,-4.1) 16(-1.25,-4.1) 17(-0.75,-4.1) 18(-0.25,-4.1) 19(0.25,-4.1) 20(0.75,-4.1) 21(1.25,-4.1) 22(1.75,-4.1) 23(2.25,-4.1) 24(2.75,-4.1) 37(2.75,4.1) 38(2.25,4.1) 39(1.75,4.1) 40(1.25,4.1) 41(0.75,4.1) 42(0.25,4.1) 43(-0.25,4.1) 44(-0.75,4.1) 45(-1.25,4.1) 46(-1.75,4.1) 47(-2.25,4.1) 48(-2.75,4.1)
  silkscreen extent -4.22,-2.65 2.65,3.57, body extent -3.5,-3.5 3.5,3.5, height 1.6
TECO-5227699-2_V [mm] "THD, 5-Leads, Body 17.45x17.45mm"
  rect 1.75x1.75 hole 1.25: 1(0,0)
  round 1.75 hole 1.25: 2(-6.35,6.35) 3(-6.35,-6.35) 4(6.35,-6.35) 5(6.35,6.35)
  silkscreen extent -8.72,-8.72 8.73,8.73, body extent -8.72,-8.72 8.73,8.73, height 18.38
TO220 [mm] "TO, Thru-Hole, Vertical, Heatsink Mounted; 3 In-Line Leads; Pitch 2.54 mm"
  rect 1.7x1.7 hole 1.1: 1(-2.54,0)
  round 1.7 hole 1.1: 2(0,0) 3(2.54,0)
  silkscreen extent -5.2,-1.75 5.2,2.85, body extent -5.25,-1.8 5.25,2.9, height 19.7
TP1 [mil] "60 mil radius test point"
  round 60 smd: 1(0,0)

## Part data
C1 C2 C37 C48: library part CL05A106MP8NUB8, "CAP CER 10UF 10V X5R 0402", Device Package="0402 (1005 Metric)", manufacturer="Samsung Electro-Mechanics", Operating Temperature="-55°C ~ 85°C", Supplier Part Number 1=1276-6830-1-ND, Temperature Coefficient=X5R, Tolerance=±20%, Voltage - Rated=10V, Applications="General Purpose", Capacitance="10 µF", componentlink1description=Datasheet, componentlink1url=http://www.samsungsem.com/kr/support/product-search/mlcc/CL05A106MP8NUB8.jsp, componentlink2description="DigiKey Link", componentlink2url=https://www.digikey.com/en/products/detail/samsung-electro-mechanics/CL05A106MP8NUB8/5961314, lastupdated="2022-07-15 11:25:56 AM", Lifecycle Status=Active, Minimum Order=1, Mounting Type="Surface Mount, MLCC", Package / Case="0402 (1005 Metric)", packaging=TapeAndReel, Part Number=CL05A106MP8NUB8, Part Status=Active, partid=1758, price=0.07, series=CL, Size / Dimension="0.039\" L x 0.020\" W (1.00mm x 0.50mm)", Supplier 1=DigiKey, Thickness (Max)="0.035\" (0.90mm)"
C3: library part GRM155C71A105KE11D, "CAP CER 1UF 10V X7S 0402", Device Package="0402 (1005 Metric)", manufacturer="Murata Electronics", Operating Temperature="-55°C ~ 125°C", Supplier Part Number 1=490-14457-1-ND, Temperature Coefficient=X7S, Tolerance=±10%, Voltage - Rated=10V, Applications="General Purpose", Capacitance="1 µF", componentlink1description=Datasheet, componentlink1url=https://search.murata.co.jp/Ceramy/image/img/A01X/G101/ENG/GRM155C71A105KE11-01.pdf, componentlink2description="DigiKey Link", componentlink2url=https://www.digikey.com/en/products/detail/murata-electronics/GRM155C71A105KE11D/6606086, lastupdated="2022-07-15 11:25:56 AM", Lifecycle Status=Active, Minimum Order=1, Mounting Type="Surface Mount, MLCC", Package / Case="0402 (1005 Metric)", packaging=TapeAndReel, Part Number=GRM155C71A105KE11D, Part Status=Active, partid=1749, price=0.01, series=GRM, Size / Dimension="0.039\" L x 0.020\" W (1.00mm x 0.50mm)", Supplier 1=DigiKey, Thickness (Max)="0.024\" (0.60mm)"
C4 C11 C16 C17 C18 C19 C20 C21 C22 C24 C26 C29 C30 C36_AFE_CHANNEL_A C36_AFE_CHANNEL_B C38 C39 C40 C41 C42 C43 C44 C45 C46 C47: library part CGA2B3X5R1H104M050BB, "CAP CER 0.1UF 50V X5R 0402", Device Package="0402 (1005 Metric)", manufacturer="TDK Corporation", Operating Temperature="-55°C ~ 85°C", Ratings=AEC-Q200, Supplier Part Number 1=445-12214-1-ND, Temperature Coefficient=X5R, Tolerance=±20%, Voltage - Rated=50V, Applications=Automotive, Capacitance="0.1 µF", componentlink1description=Datasheet, componentlink1url=https://product.tdk.com/info/en/catalog/datasheets/mlcc_automotive_general_en.pdf?ref_disty=digikey, componentlink2description="DigiKey Link", componentlink2url=https://www.digikey.com/en/products/detail/tdk-corporation/CGA2B3X5R1H104M050BB/3949450, Lifecycle Status=Active, Minimum Order=1, Mounting Type="Surface Mount, MLCC", Package / Case="0402 (1005 Metric)", packaging=TapeAndReel, Part Number=CGA2B3X5R1H104M050BB, Part Status=Active, partid=1792, price=0.02, series=CGA, Size / Dimension="0.039\" L x 0.020\" W (1.00mm x 0.50mm)", Supplier 1=DigiKey, Thickness (Max)="0.022\" (0.55mm)"
  C4 C11: lastupdated="2022-07-15 11:25:55 AM"
  C16 C17 C18 C19 C20 C21 C22 C24 C26 C29 C30 C36_AFE_CHANNEL_A C36_AFE_CHANNEL_B C38 C39 C40 C41 C42 C43 C44 C45 C46 C47: lastupdated="2022-07-21 3:55:54 AM"
C5 C12 C32 C34: library part 0402ZC104KAT2A, "CAP CER 0.1UF 10V X7R 0402", Device Package="0402 (1005 Metric)", manufacturer="AVX Corporation", Operating Temperature="-55°C ~ 125°C", Supplier Part Number 1=478-7891-1-ND, Temperature Coefficient=X7R, Tolerance=±10%, Voltage - Rated=10V, Applications="General Purpose", Capacitance=0.1µF, componentlink1description=Datasheet, componentlink1url=http://datasheets.avx.com/X7RDielectric.pdf, componentlink2description="DigiKey Link", componentlink2url=http://digikey.com/product-detail/en/avx-corporation/0402ZC104KAT2A/478-7891-1-ND/3881514, lastupdated="2022-02-08 12:26:59 PM", Lifecycle Status=Active, Minimum Order=1, Mounting Type="Surface Mount, MLCC", Package / Case="0402 (1005 Metric)", packaging=TapeAndReel, Part Number=0402ZC104KAT2A, Part Status=Active, partid=1757, price=0.09, series=-, Size / Dimension="0.039\" L x 0.020\" W (1.00mm x 0.50mm)", Supplier 1=DigiKey, Thickness (Max)="0.022\" (0.55mm)"
C6: library part EMK316BJ106MD-T, "CAP CER 10UF 16V X5R 1206", Device Package="1206 (3216 Metric)", manufacturer="Taiyo Yuden", Operating Temperature="-55°C ~ 85°C", Supplier Part Number 1=587-4881-1-ND, Temperature Coefficient=X5R, Tolerance=±20%, Voltage - Rated=16V, Applications="SMPS Filtering", Capacitance="10 µF", componentlink1description=Datasheet, componentlink1url=http://www.yuden.co.jp/productdata/catalog/mlcc06_e.pdf, componentlink2description="DigiKey Link", componentlink2url=https://www.digikey.com/en/products/detail/taiyo-yuden/EMK316BJ106MD-T/6563474, lastupdated="2022-07-15 11:34:50 AM", Lifecycle Status=Active, Minimum Order=1, Mounting Type="Surface Mount, MLCC", Package / Case="1206 (3216 Metric)", packaging=TapeAndReel, Part Number=EMK316BJ106MD-T, Part Status=Active, partid=18996, price=0.07, series=M, Size / Dimension="0.126\" L x 0.063\" W (3.20mm x 1.60mm)", Supplier 1=DigiKey, Thickness (Max)="0.037\" (0.95mm)"
C7: library part GRM21BC8YA106KE11L, "CAP CER 10UF 35V X6S 0805", Device Package="0805 (2012 Metric)", manufacturer="Murata Electronics", Operating Temperature="-55°C ~ 105°C", Supplier Part Number 1=490-10504-1-ND, Temperature Coefficient=X6S, Tolerance=±10%, Voltage - Rated=35V, Applications="General Purpose", Capacitance="10 µF", componentlink1description=Datasheet, componentlink1url=https://search.murata.co.jp/Ceramy/image/img/A01X/G101/ENG/GRM21BC8YA106KE11-01.pdf, componentlink2description="DigiKey Link", componentlink2url=https://www.digikey.com/en/products/detail/murata-electronics/GRM21BC8YA106KE11L/5027589, lastupdated="2022-07-21 4:01:21 AM", Lifecycle Status=Active, Minimum Order=1, Mounting Type="Surface Mount, MLCC", Package / Case="0805 (2012 Metric)", packaging=TapeAndReel, Part Number=GRM21BC8YA106KE11L, Part Status=Active, partid=16091, price=0.11, series=GRM, Size / Dimension="0.079\" L x 0.049\" W (2.00mm x 1.25mm)", Supplier 1=DigiKey, Thickness (Max)="0.057\" (1.45mm)"
C8 C15 C23 C25: library part CL05A475MO5NUNC, "CAP CER 4.7UF 16V X5R 0402", Device Package="0402 (1005 Metric)", manufacturer="Samsung Electro-Mechanics", Operating Temperature="-55°C ~ 85°C", Supplier Part Number 1=1276-6836-1-ND, Temperature Coefficient=X5R, Tolerance=±20%, Voltage - Rated=16V, Applications="General Purpose", Capacitance="4.7 µF", componentlink1description=Datasheet, componentlink1url=http://www.samsungsem.com/kr/support/product-search/mlcc/__icsFiles/afieldfile/2019/05/29/Data%20sheet_CL05A475MO5NUNC.pdf, componentlink2description="DigiKey Link", componentlink2url=https://www.digikey.com/en/products/detail/samsung-electro-mechanics/CL05A475MO5NUNC/5961320, lastupdated="2022-07-21 3:55:55 AM", Lifecycle Status=Active, Minimum Order=1, Mounting Type="Surface Mount, MLCC", Package / Case="0402 (1005 Metric)", packaging=TapeAndReel, Part Number=CL05A475MO5NUNC, Part Status=Active, partid=1760, price=0.09, series=CL, Size / Dimension="0.039\" L x 0.020\" W (1.00mm x 0.50mm)", Supplier 1=DigiKey, Thickness (Max)="0.028\" (0.70mm)"
C9 C27 C28: library part 04023U200JAT2A, "CAP CER 20PF 25V NP0 0402", Device Package="0402 (1005 Metric)", manufacturer="AVX Corporation", Operating Temperature="-55°C ~ 125°C", Supplier Part Number 1=478-11758-1-ND, Temperature Coefficient="C0G, NP0", Tolerance=±5%, Voltage - Rated=25V, Applications="RF, Microwave, High Frequency", Capacitance=20pF, componentlink1description=Datasheet, componentlink1url=http://datasheets.avx.com/U-Series.pdf, componentlink2description="DigiKey Link", componentlink2url=http://digikey.com/product-detail/en/avx-corporation/04023U200JAT2A/478-11758-1-ND/8573394, Features="Ultra Low ESR", lastupdated="2022-02-08 12:26:58 PM", Lifecycle Status=Active, Minimum Order=1, Mounting Type="Surface Mount, MLCC", Package / Case="0402 (1005 Metric)", packaging=TapeAndReel, Part Number=04023U200JAT2A, Part Status=Active, partid=1805, price=0.02, series=U, Size / Dimension="0.039\" L x 0.020\" W (1.00mm x 0.50mm)", Supplier 1=DigiKey, Thickness (Max)="0.022\" (0.55mm)"
C10: library part HMK105B7103KVHFE, "CAP MLCC 0.01UF 100V X7R 0402", Device Package="0402 (1005 Metric)", manufacturer="Taiyo Yuden", Operating Temperature="-55°C ~ 125°C", Ratings=AEC-Q200, Supplier Part Number 1=587-HMK105B7103KVHFECT-ND, Temperature Coefficient=X7R, Tolerance=±10%, Voltage - Rated=100V, Applications="Automotive, SMPS Filtering", Capacitance="10000 pF", componentlink1description=Datasheet, componentlink1url=https://ds.yuden.co.jp/TYCOMPAS/ut/detail?pn=HMK105B7103KVHFE&u=M, componentlink2description="DigiKey Link", componentlink2url=https://www.digikey.com/en/products/detail/taiyo-yuden/HMK105B7103KVHFE/11687483, lastupdated="2022-07-15 11:24:57 AM", Lifecycle Status=Active, Minimum Order=1, Mounting Type="Surface Mount, MLCC", Package / Case="0402 (1005 Metric)", packaging=TapeAndReel, Part Number=HMK105B7103KVHFE, Part Status=Active, partid=41784, price=0.02, series=M, Size / Dimension="0.039\" L x 0.020\" W (1.00mm x 0.50mm)", Supplier 1=DigiKey, Thickness (Max)="0.022\" (0.55mm)"
C13 C14: library part 06031A360JAT2A, "CAP CER 36PF 100V NP0 0603", Device Package="0603 (1608 Metric)", manufacturer="AVX Corporation", Operating Temperature="-55°C ~ 125°C", Supplier Part Number 1=478-10202-1-ND, Temperature Coefficient="C0G, NP0", Tolerance=±5%, Voltage - Rated=100V, Applications="General Purpose", Capacitance=36pF, componentlink1description=Datasheet, componentlink1url=http://datasheets.avx.com/C0GNP0-Dielectric.pdf, componentlink2description="DigiKey Link", componentlink2url=http://digikey.com/product-detail/en/avx-corporation/06031A360JAT2A/478-10202-1-ND/6797206, lastupdated="2020-09-02 1:03:27 AM", Lifecycle Status=Active, Minimum Order=1, Mounting Type="Surface Mount, MLCC", Package / Case="0603 (1608 Metric)", packaging=TapeAndReel, Part Number=06031A360JAT2A, Part Status=Active, partid=7331, price=0.04, series=-, Size / Dimension="0.063\" L x 0.032\" W (1.60mm x 0.81mm)", Supplier 1=DigiKey, Thickness (Max)="0.035\" (0.90mm)"
C31: library part C0603C105K4RACAUTO, "CAP CER 1UF 16V X7R 0603", Device Package="0603 (1608 Metric)", manufacturer=KEMET, Operating Temperature="-55°C ~ 125°C", Ratings=AEC-Q200, Supplier Part Number 1=399-17704-2-ND, Temperature Coefficient=X7R, Tolerance=±10%, Voltage - Rated=16V, Applications="Automotive, Bypass, Decoupling", Capacitance="1 µF", componentlink1description=Datasheet, componentlink1url=https://api.kemet.com/component-edge/download/datasheet/C0603C105K4RACAUTO.pdf, componentlink2description="DigiKey Link", componentlink2url=https://www.digikey.com/en/products/detail/kemet/C0603C105K4RACAUTO/8635831, lastupdated="2022-09-18 12:11:25 PM", Lifecycle Status=Active, Minimum Order=1, Mounting Type="Surface Mount, MLCC", Package / Case="0603 (1608 Metric)", packaging=CutTape, Part Number=C0603C105K4RACAUTO, Part Status=Active, partid=2179, price=0.03, series="SMD Auto X7R", Size / Dimension="0.063\" L x 0.031\" W (1.60mm x 0.80mm)", Supplier 1=DigiKey, Thickness (Max)="0.037\" (0.95mm)"
C33 C35: library part C0603C472K4RECAUTO, "CAP CER 0603 4.7NF 16V X7R 10%", Device Package="0603 (1608 Metric)", manufacturer=KEMET, Operating Temperature="-55°C ~ 125°C", Ratings=AEC-Q200, Supplier Part Number 1=399-17879-1-ND, Temperature Coefficient=X7R, Tolerance=±10%, Voltage - Rated=16V, Applications="Automotive, ESD Protection", Capacitance="4700 pF", componentlink1description=Datasheet, componentlink1url=https://api.kemet.com/component-edge/download/datasheet/C0603C472K4RECAUTO.pdf, componentlink2description="DigiKey Link", componentlink2url=https://www.digikey.com/en/products/detail/kemet/C0603C472K4RECAUTO/8640473, lastupdated="2022-09-18 12:10:47 PM", Lifecycle Status=Active, Minimum Order=1, Mounting Type="Surface Mount, MLCC", Package / Case="0603 (1608 Metric)", packaging=TapeAndReel, Part Number=C0603C472K4RECAUTO, Part Status=Active, partid=17340, price=0.02, series="ESD SMD Auto X7R", Size / Dimension="0.063\" L x 0.031\" W (1.60mm x 0.80mm)", Supplier 1=DigiKey, Thickness (Max)="0.034\" (0.87mm)"
C49_AFE_CHANNEL_A C49_AFE_CHANNEL_B: library part CC0603JRNPO9BN161, "CAP CER 160PF 50V C0G/NPO 0603", Device Package="0603 (1608 Metric)", manufacturer=Yageo, Operating Temperature="-55°C ~ 125°C", Supplier Part Number 1=311-3965-1-ND, Temperature Coefficient="C0G, NP0", Tolerance=±5%, Voltage - Rated=50V, Applications="General Purpose", Capacitance="160 pF", componentlink1description=Datasheet, componentlink1url=https://www.yageo.com/upload/media/product/productsearch/datasheet/mlcc/UPY-GP_NP0_16V-to-50V_17.pdf, componentlink2description="DigiKey Link", componentlink2url=https://www.digikey.com/en/products/detail/yageo/CC0603JRNPO9BN161/5883607, lastupdated="2022-09-19 1:01:05 PM", Lifecycle Status=Active, Minimum Order=1, Mounting Type="Surface Mount, MLCC", Package / Case="0603 (1608 Metric)", packaging=TapeAndReel, Part Number=CC0603JRNPO9BN161, Part Status=Active, partid=7497, price=0.02, series=CC, Size / Dimension="0.063\" L x 0.031\" W (1.60mm x 0.80mm)", Supplier 1=DigiKey, Thickness (Max)="0.035\" (0.90mm)"
D1 D3: library part APTL3216QBC/D-01, "LED SMD", Current - Test=20mA, Device Package="1206 (3216 Metric)", Lens Color=Colorless, manufacturer=Kingbright, Millicandela Rating=250mcd, Supplier Device Package=1206, Supplier Part Number 1=754-APTL3216QBC/D-01CT-ND, Voltage - Forward (Vf) (Typ)=3.3V, Color=Blue, componentlink1description=Datasheet, componentlink1url=http://www.kingbrightusa.com/images/catalog/SPEC/APTL3216QBC-D-01.pdf, componentlink2description="DigiKey Link", componentlink2url=https://www.digikey.com/en/products/detail/kingbright/APTL3216QBC-D-01/10293090, Configuration=1206, Height (Max)=1.20mm, lastupdated="2022-07-15 12:08:20 PM", Lens Size="1.10mm Dia", Lens Style="Round with Domed Top", Lens Transparency=Clear, Lifecycle Status=Active, Minimum Order=1, Mounting Type="Surface Mount", Package / Case="1206 (3216 Metric)", packaging=TapeAndReel, Part Number=APTL3216QBC/D-01, Part Status=Active, partid=735, price=0.13, series=Heli-R, Size / Dimension="3.20mm L x 1.60mm W", Supplier 1=DigiKey, Viewing Angle=80°, Wavelength - Dominant=465nm, Wavelength - Peak=460nm
D2 D5: library part APTL3216ZGCK-01, "LED SMD", Current - Test=20mA, Device Package="1206 (3216 Metric)", Lens Color=Colorless, manufacturer=Kingbright, Millicandela Rating=1000mcd, Supplier Device Package=1206, Supplier Part Number 1=754-APTL3216ZGCK-01CT-ND, Voltage - Forward (Vf) (Typ)=3.3V, Color=Green, componentlink1description=Datasheet, componentlink1url=http://www.kingbrightusa.com/images/catalog/SPEC/APTL3216ZGCK-01.pdf, componentlink2description="DigiKey Link", componentlink2url=https://www.digikey.com/en/products/detail/kingbright/APTL3216ZGCK-01/10293089, Configuration=1206, Height (Max)=1.20mm, lastupdated="2022-07-15 12:08:33 PM", Lens Size="1.10mm Dia", Lens Style="Round with Domed Top", Lens Transparency=Clear, Lifecycle Status=Active, Minimum Order=1, Mounting Type="Surface Mount", Package / Case="1206 (3216 Metric)", packaging=TapeAndReel, Part Number=APTL3216ZGCK-01, Part Status=Active, partid=546, price=0.18, series=Heli-R, Size / Dimension="3.20mm L x 1.60mm W", Supplier 1=DigiKey, Viewing Angle=80°, Wavelength - Dominant=525nm, Wavelength - Peak=515nm
FB1 FB2 FB3: library part MMZ0603F330CT000, "FERRITE BEAD 33 OHM 0201 1LN", Current Rating (Max)=150mA, DC Resistance (DCR) (Max)=1.3Ohm, Device Package="0201 (0603 Metric)", manufacturer="TDK Corporation", Operating Temperature="-55°C ~ 125°C", Supplier Part Number 1=445-7792-1-ND, componentlink1description=Datasheet, componentlink1url=https://product.tdk.com/info/en/catalog/datasheets/beads_commercial_signal_mmz0603_en.pdf?ref_disty=digikey, componentlink2description="DigiKey Link", componentlink2url=https://www.digikey.com/en/products/detail/tdk-corporation/MMZ0603F330CT000/2747662, Filter Type="Signal Line", Height (Max)="0.013\" (0.33mm)", Impedance @ Frequency="33 Ohms @ 100 MHz", lastupdated="2022-07-21 4:37:41 AM", Lifecycle Status=Active, Minimum Order=1, Mounting Type="Surface Mount", Number of Lines=1, Package / Case="0201 (0603 Metric)", packaging=TapeAndReel, Part Number=MMZ0603F330CT000, Part Status=Active, partid=1, price=0.03, series=MMZ, Size / Dimension="0.024\" L x 0.012\" W (0.60mm x 0.30mm)", Supplier 1=DigiKey
J1 J3 J4: library part CMP-2000-05627-1, "Jack BNC Connector, 1 Position, Height 16.26 mm, Tail Length 6.35 mm, -55 to 85 degC, RoHS, Tube", Frequency - Max=4GHz, manufacturer="TE Connectivity", Package Description="Jack BNC Connector, 1 Position, Height 16.26 mm, Tail Length 6.35 mm", Standard Package=30, 3D Model=5227699-2.pdf, Category=Connectors,Interconnects, Connector Style=BNC, Connector Type=Jack,FemaleSockets, Contact Termination=Solder, Datasheet URL=http://www.te.com/commerce/DocumentDelivery/DDEController?Action=showdoc&DocId=Customer+Drawing%7F5227699%7FA1%7Fpdf%7FEnglish%7FENG_CD_5227699_A1.pdf%7F5227699-2, Datasheet Version="Rev. A1, 03/2011", Dynamic Catalog=BNCConnectors, Family=CoaxialConnectors(RF), Fastening Type=BayonetLock, Impedance=50Ohm, Manufacturer URL=http://www.te.com/, Mounting Technology=ThroughHole, Mounting Type=ThroughHole,Flange(Square), Other Names=A32269, Package Reference=5227699-2, packaging=Bulk, RoHS Information=5227699-2StatementofCompliance, series=BNC
J2: "CONN RCPT MINI USB B 5POS SMD RA", Current Rating (Amps)="1A per Contact", manufacturer="Amphenol ICC (FCI)", Operating Temperature="-25°C ~ 85°C", Supplier Part Number 1=609-4700-2-ND, Voltage - Rated=30V, componentlink1description=Datasheet, componentlink1url=http://www.amphenol-icc.com/media/wysiwyg/files/drawing/10033526.pdf, componentlink2description="DigiKey Link", componentlink2url=//digikey.com/product-detail/en/amphenol-icc-fci/10033526-N3212LF/609-4700-2-ND/4292074, Connector Type="USB - mini B", Features="Board Guide, Solder Retention", Gender=Receptacle, lastupdated="2019-12-09 8:52:14 PM", Lifecycle Status=0, Mating Cycles=5000, Minimum Order=1, Mounting Feature=Horizontal, Mounting Type="Surface Mount, Right Angle", Number of Contacts=5, Number of Ports=1, packaging=TapeAndReel, Part Number=10033526-N3212LF, Part Status=Active, price=0.39, series=-, Shielding=Shielded, Supplier 1=DigiKey, Termination=Solder
P1 P2: "Header, 24-Pin", LatestRevisionDate=17-Jul-2002, LatestRevisionNote="Re-released for DXP Platform.", Publisher="Altium Limited"
P3 P4 P5 P6 P7: "Header, 2-Pin", LatestRevisionDate=17-Jul-2002, LatestRevisionNote="Re-released for DXP Platform.", Publisher="Altium Limited"
P8: "Header, 4-Pin", LatestRevisionDate=17-Jul-2002, LatestRevisionNote="Re-released for DXP Platform.", Publisher="Altium Limited"
P9: "Header, 8-Pin", LatestRevisionDate=17-Jul-2002, LatestRevisionNote="Re-released for DXP Platform.", Publisher="Altium Limited"
R1 R2: library part CRT0603-BY-10R0ELF, "RES SMD 10 OHM 0.1% 1/10W 0603", Device Package="0603 (1608 Metric)", manufacturer="Bourns Inc.", Operating Temperature="-55°C ~ 155°C", Power (Watts)="0.1W, 1/10W", Supplier Device Package=0603, Supplier Part Number 1=CRT0603-BY-10R0ELFCT-ND, Temperature Coefficient=±25ppm/°C, Tolerance=±0.1%, componentlink1description=Datasheet, componentlink1url=https://www.bourns.com/docs/Product-Datasheets/crt.pdf, componentlink2description="DigiKey Link", componentlink2url=https://www.digikey.com/en/products/detail/bourns-inc/CRT0603-BY-10R0ELF/1775018, Composition="Thin Film", Features="Current Sense", Height - Seated (Max)="0.024\" (0.60mm)", lastupdated="2022-07-15 11:50:25 AM", Lifecycle Status=Active, Minimum Order=1, Number of Terminations=2, Package / Case="0603 (1608 Metric)", packaging=TapeAndReel, Part Number=CRT0603-BY-10R0ELF, Part Status=Active, partid=4866, price=0.04, Resistance="10 Ohms", series=CRT, Size / Dimension="0.061\" L x 0.031\" W (1.55mm x 0.80mm)", Supplier 1=DigiKey
R3 R6 R13: library part CRGP0402F220R, "RES 220 OHM 1% 1/8W 0402", Device Package="0402 (1005 Metric)", manufacturer="TE Connectivity Passive Product", Operating Temperature="-55°C ~ 155°C", Power (Watts)="0.125W, 1/8W", Supplier Device Package=0402, Supplier Part Number 1=A130347CT-ND, Temperature Coefficient=±100ppm/°C, Tolerance=±1%, componentlink1description=Datasheet, componentlink1url=https://www.te.com/commerce/DocumentDelivery/DDEController?Action=srchrtrv&DocNm=9-1773463-9&DocType=DS&DocLang=English, componentlink2description="DigiKey Link", componentlink2url=https://www.digikey.com/en/products/detail/te-connectivity-passive-product/CRGP0402F220R/8576949, Composition="Thick Film", Features="Pulse Withstanding", Height - Seated (Max)="0.016\" (0.40mm)", lastupdated="2022-07-15 11:43:01 AM", Lifecycle Status=Active, Minimum Order=1, Number of Terminations=2, Package / Case="0402 (1005 Metric)", packaging=TapeAndReel, Part Number=CRGP0402F220R, Part Status=Active, partid=6226, price=0.01, Resistance="220 Ohms", series=CRGP, Size / Dimension="0.043\" L x 0.020\" W (1.10mm x 0.50mm)", Supplier 1=DigiKey
R4: library part AC0402JR-07330RL, "RES SMD 330 OHM 5% 1/16W 0402", Device Package="0402 (1005 Metric)", manufacturer=Yageo, Operating Temperature="-55°C ~ 155°C", Power (Watts)="0.063W, 1/16W", Ratings=AEC-Q200, Supplier Device Package=0402, Supplier Part Number 1=YAG3542CT-ND, Temperature Coefficient=±100ppm/°C, Tolerance=±5%, componentlink1description=Datasheet, componentlink1url=https://www.yageo.com/upload/media/product/productsearch/datasheet/rchip/PYu-AC_51_RoHS_L_7.pdf, componentlink2description="DigiKey Link", componentlink2url=https://www.digikey.com/en/products/detail/yageo/AC0402JR-07330RL/5895651, Composition="Thick Film", Features="Automotive AEC-Q200, Moisture Resistant", Height - Seated (Max)="0.015\" (0.37mm)", lastupdated="2022-07-15 11:43:11 AM", Lifecycle Status=Active, Minimum Order=1, Number of Terminations=2, Package / Case="0402 (1005 Metric)", packaging=CutTape, Part Number=AC0402JR-07330RL, Part Status=Active, partid=3389, price=0.01, Resistance="330 Ohms", series=AC, Size / Dimension="0.039\" L x 0.020\" W (1.00mm x 0.50mm)", Supplier 1=DigiKey
R5: library part JR1206X40E, "1206 40 AMP JUMPER", Device Package="1206 (3216 Metric)", manufacturer=Ohmite, Operating Temperature="-55°C ~ 150°C", Power (Watts)=0.32W, Supplier Device Package=1206, Supplier Part Number 1=JR1206X40ECT-ND, Tolerance=Jumper, componentlink1description=Datasheet, componentlink1url=https://www.ohmite.com/assets/docs/res_jr.pdf?r=false, componentlink2description="DigiKey Link", componentlink2url=https://www.digikey.com/en/products/detail/ohmite/JR1206X40E/10233373, Composition="Metal Element", Height - Seated (Max)="0.028\" (0.70mm)", lastupdated="2022-07-25 2:10:41 AM", Lifecycle Status=Active, Minimum Order=1, Number of Terminations=2, Package / Case="1206 (3216 Metric)", packaging=TapeAndReel, Part Number=JR1206X40E, Part Status=Active, partid=30374, price=0.11, Resistance="0 Ohms", series=JR, Size / Dimension="0.126\" L x 0.063\" W (3.20mm x 1.60mm)", Supplier 1=DigiKey
R7: library part CPF0402B12KE1, "RES SMD 12K OHM 0.1% 1/16W 0402", Device Package="0402 (1005 Metric)", manufacturer="TE Connectivity Passive Product", Operating Temperature="-55°C ~ 155°C", Power (Watts)="0.063W, 1/16W", Supplier Device Package=0402, Supplier Part Number 1=A102603CT-ND, Temperature Coefficient=±25ppm/°C, Tolerance=±0.1%, componentlink1description=Datasheet, componentlink1url=https://www.te.com/commerce/DocumentDelivery/DDEController?Action=srchrtrv&DocNm=1773200&DocType=DS&DocLang=English, componentlink2description="DigiKey Link", componentlink2url=https://www.digikey.com/en/products/detail/te-connectivity-passive-product/CPF0402B12KE1/2381830, Composition="Thin Film", Height - Seated (Max)="0.014\" (0.35mm)", lastupdated="2022-07-15 11:43:11 AM", Lifecycle Status=Active, Minimum Order=1, Number of Terminations=2, Package / Case="0402 (1005 Metric)", packaging=TapeAndReel, Part Number=CPF0402B12KE1, Part Status=Active, partid=3318, price=0.15, Resistance="12 kOhms", series="CPF, Neohm", Size / Dimension="0.039\" L x 0.020\" W (1.00mm x 0.50mm)", Supplier 1=DigiKey
R8 R9 R10 R11 R17 R18 R19 R21 R32 R33 R34: library part RP73PF1E10KBTD, "RES 10K OHM 0.1% 1/10W 0402", Device Package="0402 (1005 Metric)", manufacturer="TE Connectivity Passive Product", Operating Temperature="-55°C ~ 155°C", Power (Watts)="0.1W, 1/10W", Supplier Device Package=0402, Supplier Part Number 1=A127415CT-ND, Temperature Coefficient=±25ppm/°C, Tolerance=±0.1%, componentlink1description=Datasheet, componentlink1url=https://www.te.com/commerce/DocumentDelivery/DDEController?Action=srchrtrv&DocNm=1773272&DocType=DS&DocLang=English, componentlink2description="DigiKey Link", componentlink2url=https://www.digikey.com/en/products/detail/te-connectivity-passive-product/RP73PF1E10KBTD/8260957, Composition="Thin Film", Height - Seated (Max)="0.014\" (0.35mm)", lastupdated="2022-07-15 11:43:14 AM", Lifecycle Status=Active, Minimum Order=1, Number of Terminations=2, Package / Case="0402 (1005 Metric)", packaging=TapeAndReel, Part Number=RP73PF1E10KBTD, Part Status=Active, partid=2434, price=0.09, Resistance="10 kOhms", series="RP73, Holsworthy", Size / Dimension="0.039\" L x 0.020\" W (1.00mm x 0.50mm)", Supplier 1=DigiKey
R12: library part RC0402FR-071K8L, "RES 1.8K OHM 1% 1/16W 0402", Device Package="0402 (1005 Metric)", manufacturer=Yageo, Operating Temperature="-55°C ~ 155°C", Power (Watts)="0.063W, 1/16W", Supplier Device Package=0402, Supplier Part Number 1=311-1.80KLRCT-ND, Temperature Coefficient=±100ppm/°C, Tolerance=±1%, componentlink1description=Datasheet, componentlink1url=https://www.yageo.com/upload/media/product/productsearch/datasheet/rchip/PYu-RC_Group_51_RoHS_L_10.pdf, componentlink2description="DigiKey Link", componentlink2url=https://www.digikey.com/en/products/detail/yageo/RC0402FR-071K8L/726520, Composition="Thick Film", Features="Moisture Resistant", Height - Seated (Max)="0.016\" (0.40mm)", lastupdated="2022-07-21 4:11:16 AM", Lifecycle Status=Active, Minimum Order=1, Number of Terminations=2, Package / Case="0402 (1005 Metric)", packaging=CutTape, Part Number=RC0402FR-071K8L, Part Status=Active, partid=2542, price=0.01, Resistance="1.8 kOhms", series=RC_L, Size / Dimension="0.039\" L x 0.020\" W (1.00mm x 0.50mm)", Supplier 1=DigiKey
R14: library part CPF0402B100KE, "RES SMD 100K OHM 0.1% 1/16W 0402", Device Package="0402 (1005 Metric)", manufacturer="TE Connectivity Passive Product", Operating Temperature="-55°C ~ 155°C", Power (Watts)="0.063W, 1/16W", Supplier Device Package=0402, Supplier Part Number 1=A119916CT-ND, Temperature Coefficient=±25ppm/°C, Tolerance=±0.1%, componentlink1description=Datasheet, componentlink1url=https://www.te.com/commerce/DocumentDelivery/DDEController?Action=srchrtrv&DocNm=1773200&DocType=DS&DocLang=English, componentlink2description="DigiKey Link", componentlink2url=https://www.digikey.com/en/products/detail/te-connectivity-passive-product/CPF0402B100KE/4966480, Composition="Thin Film", Height - Seated (Max)="0.014\" (0.35mm)", lastupdated="2022-09-19 1:15:04 PM", Lifecycle Status=Active, Minimum Order=1, Number of Terminations=2, Package / Case="0402 (1005 Metric)", packaging=TapeAndReel, Part Number=CPF0402B100KE, Part Status=Active, partid=2472, price=0.10, Resistance="100 kOhms", series="CPF, Neohm", Size / Dimension="0.039\" L x 0.020\" W (1.00mm x 0.50mm)", Supplier 1=DigiKey
R15 R23 R24_AFE_CHANNEL_A R24_AFE_CHANNEL_B R25_AFE_CHANNEL_A R25_AFE_CHANNEL_B: library part 5110, "RES SMD 0 OHM JUMPER 1/2W 0603", Device Package="0603 (1608 Metric)", manufacturer="Keystone Electronics", Power (Watts)="0.5W, 1/2W", Supplier Device Package=0603, Supplier Part Number 1=36-5110CT-ND, Tolerance=Jumper, componentlink1description=Datasheet, componentlink1url=http://keyelco.com/userAssets/file/M65p54.pdf, componentlink2description="DigiKey Link", componentlink2url=https://www.digikey.com/en/products/detail/keystone-electronics/5110/5118870, Composition="Metal Element", Height - Seated (Max)="0.028\" (0.70mm)", lastupdated="2022-09-14 8:08:57 AM", Lifecycle Status=Active, Minimum Order=1, Number of Terminations=2, Package / Case="0603 (1608 Metric)", packaging=TapeAndReel, Part Number=5110, Part Status=Active, partid=20779, price=0.16, Resistance="0 Ohms", series=-, Size / Dimension="0.061\" L x 0.033\" W (1.55mm x 0.85mm)", Supplier 1=DigiKey